# Altium PCB vt18_cpu_board.PcbDoc (part 1 of 7)
Units mil, origin at the board's own origin, x right, y up, seen from the top; angles counter-clockwise.
Board outline 2283.46 x 2244.09 mil, 8 copper layers (Top Layer, GND1, Signal Layer 1, POWER1, POWER2, Signal Layer 2, GND2, Bottom Layer), stack 66.304 mil thick; 339 components, 286 nets, 1965 pads, 1047 vias.
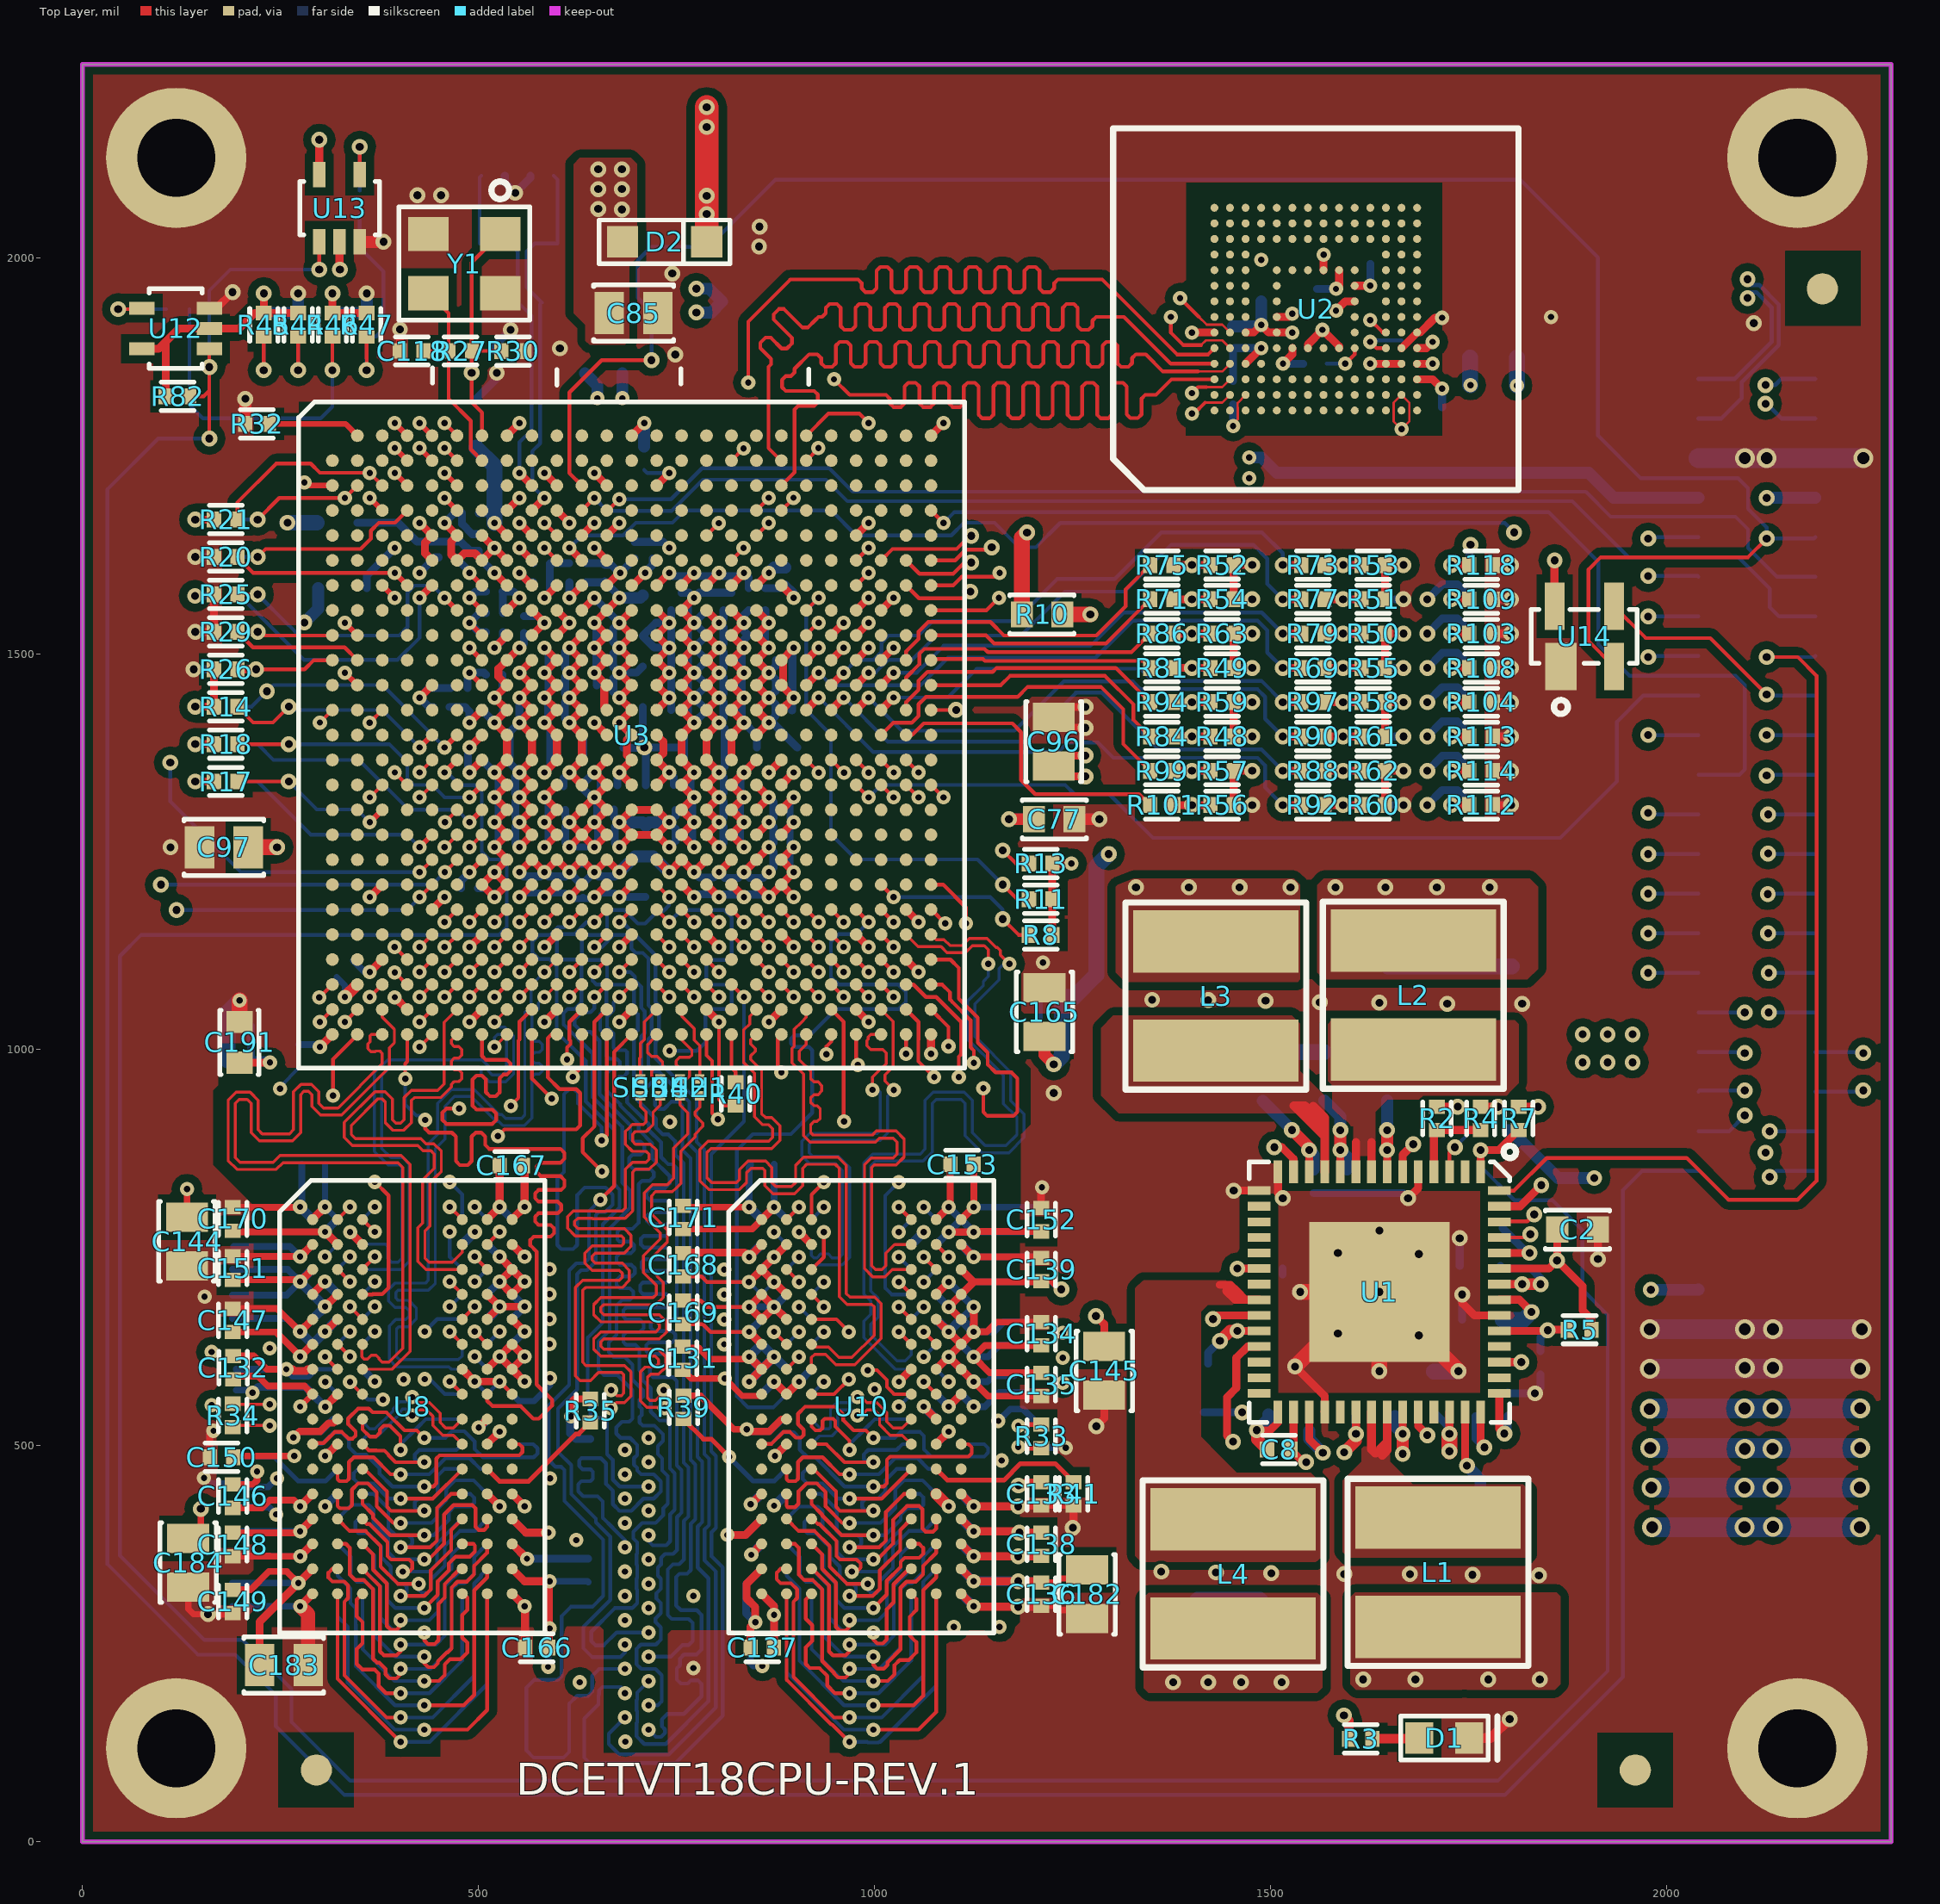
[diagram p0: Top Layer view]
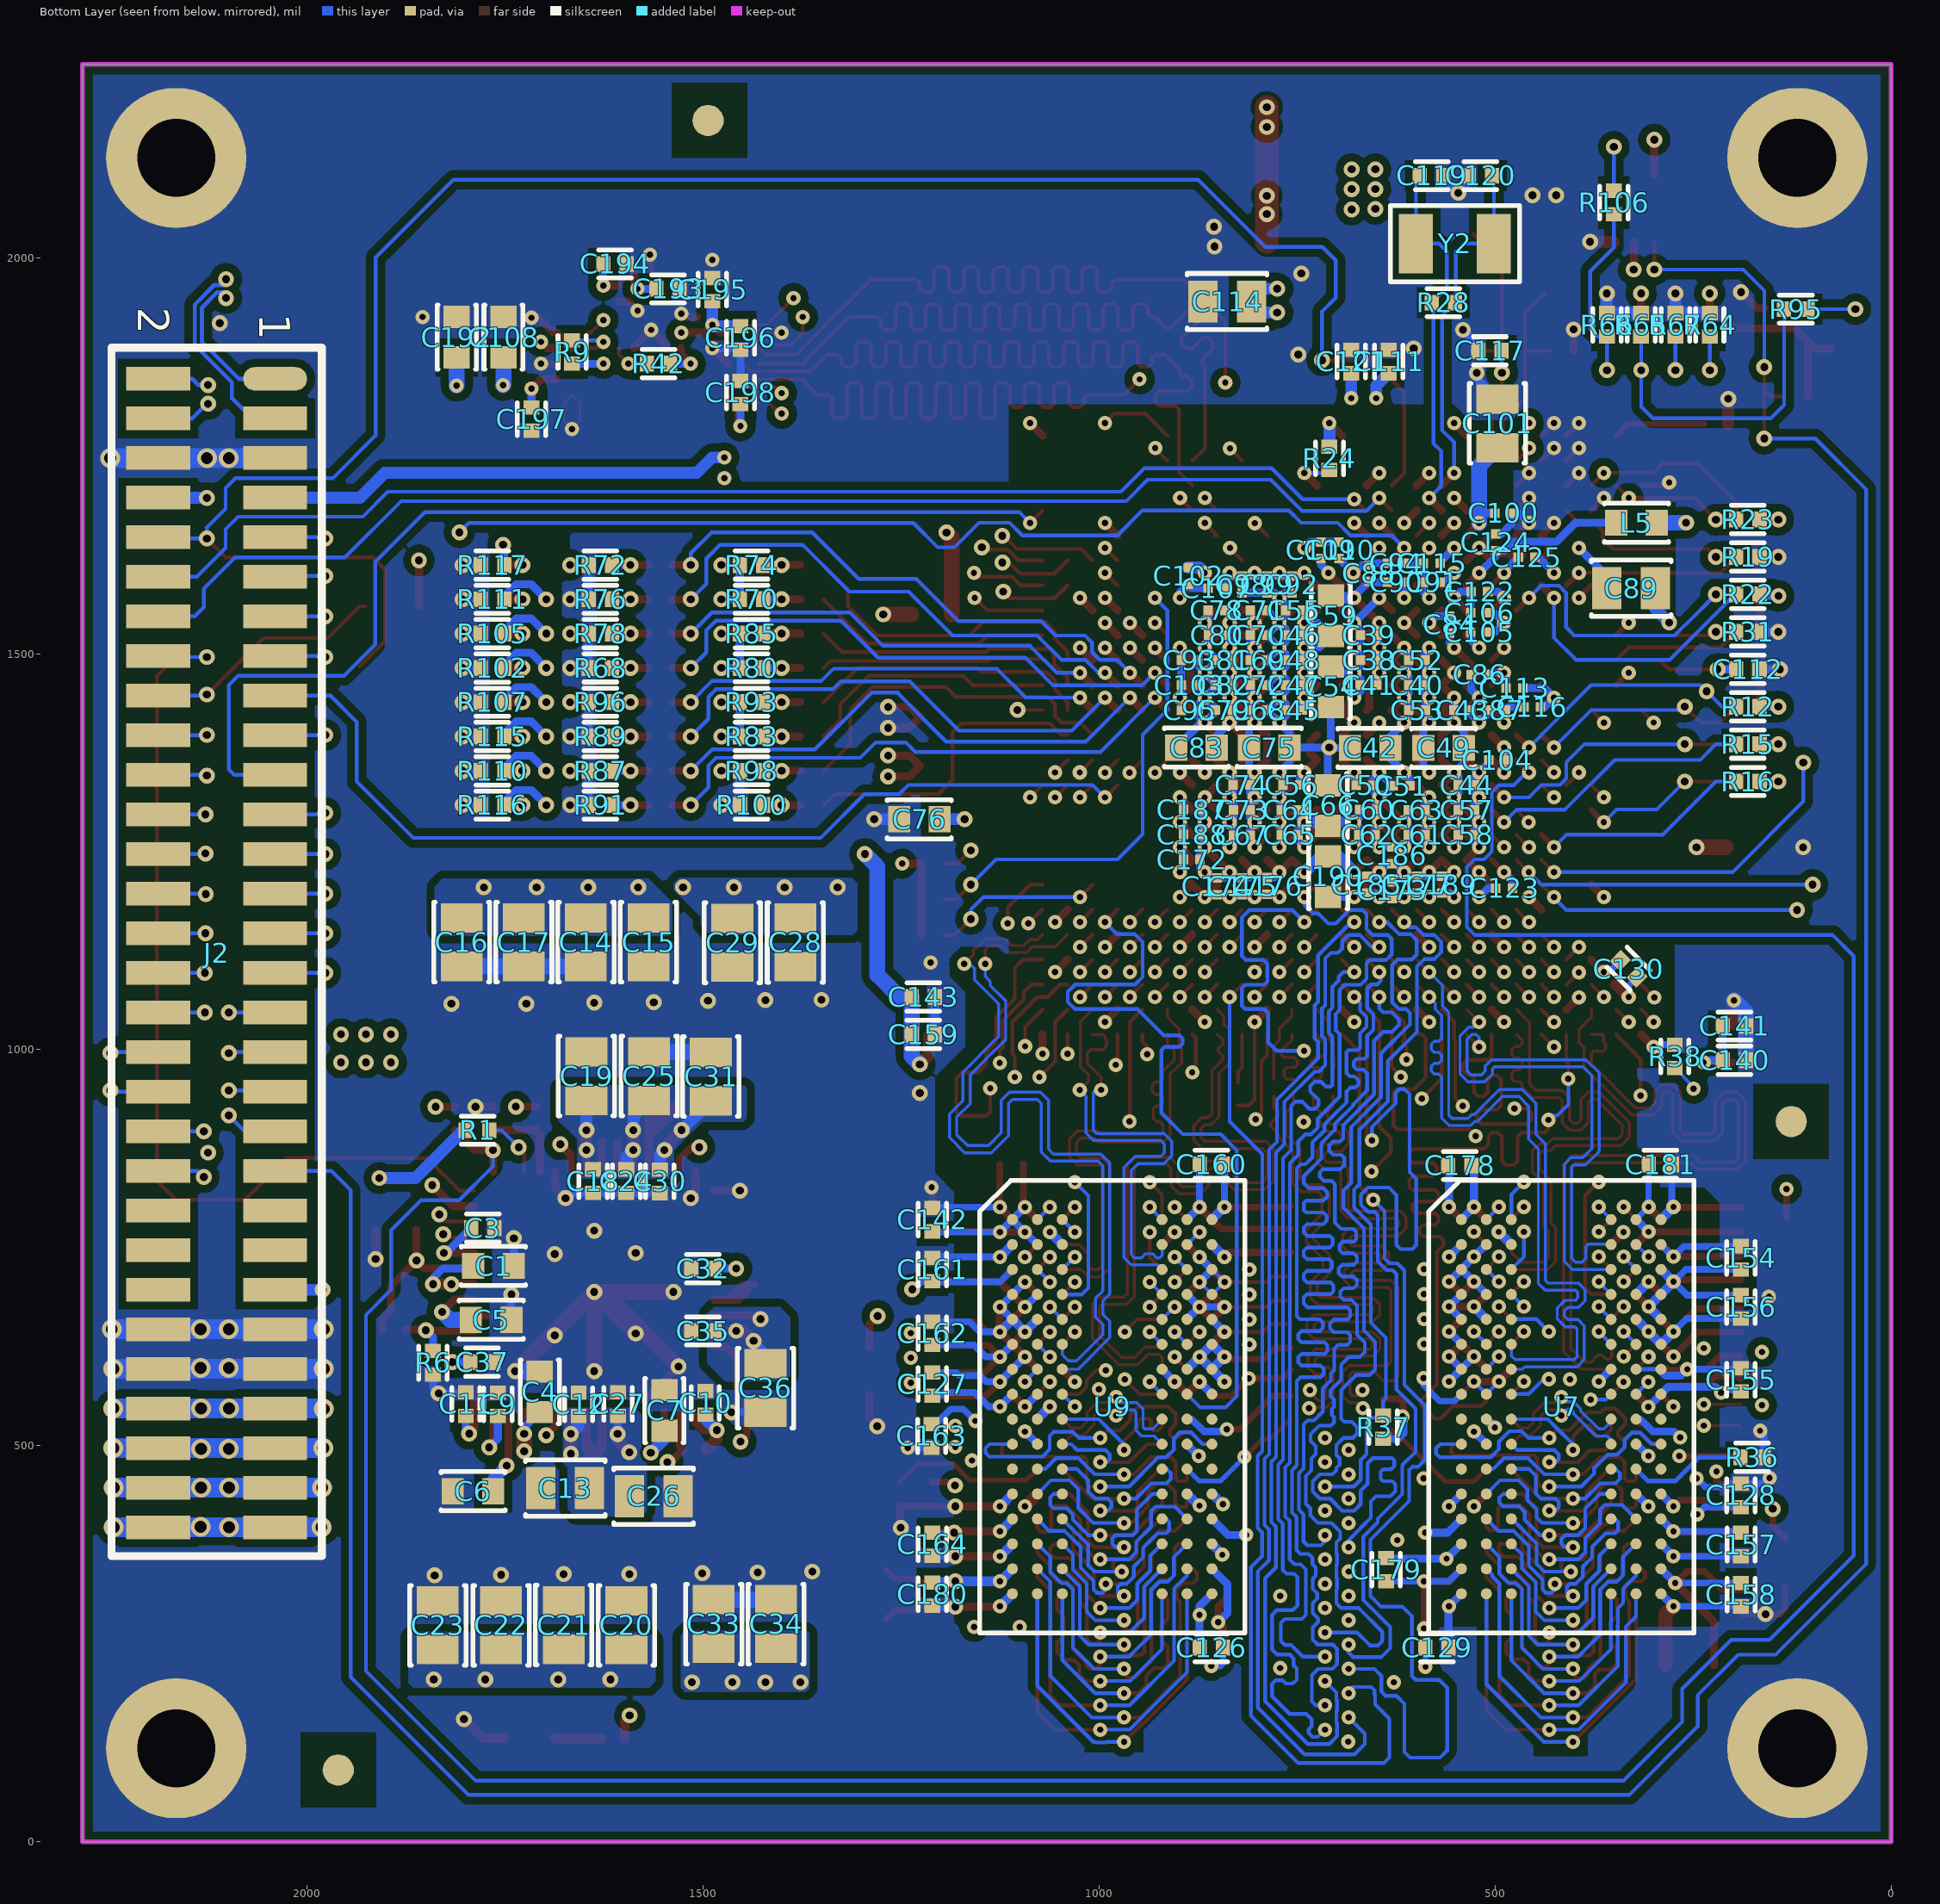
[diagram p1: Bottom Layer view, seen from below]
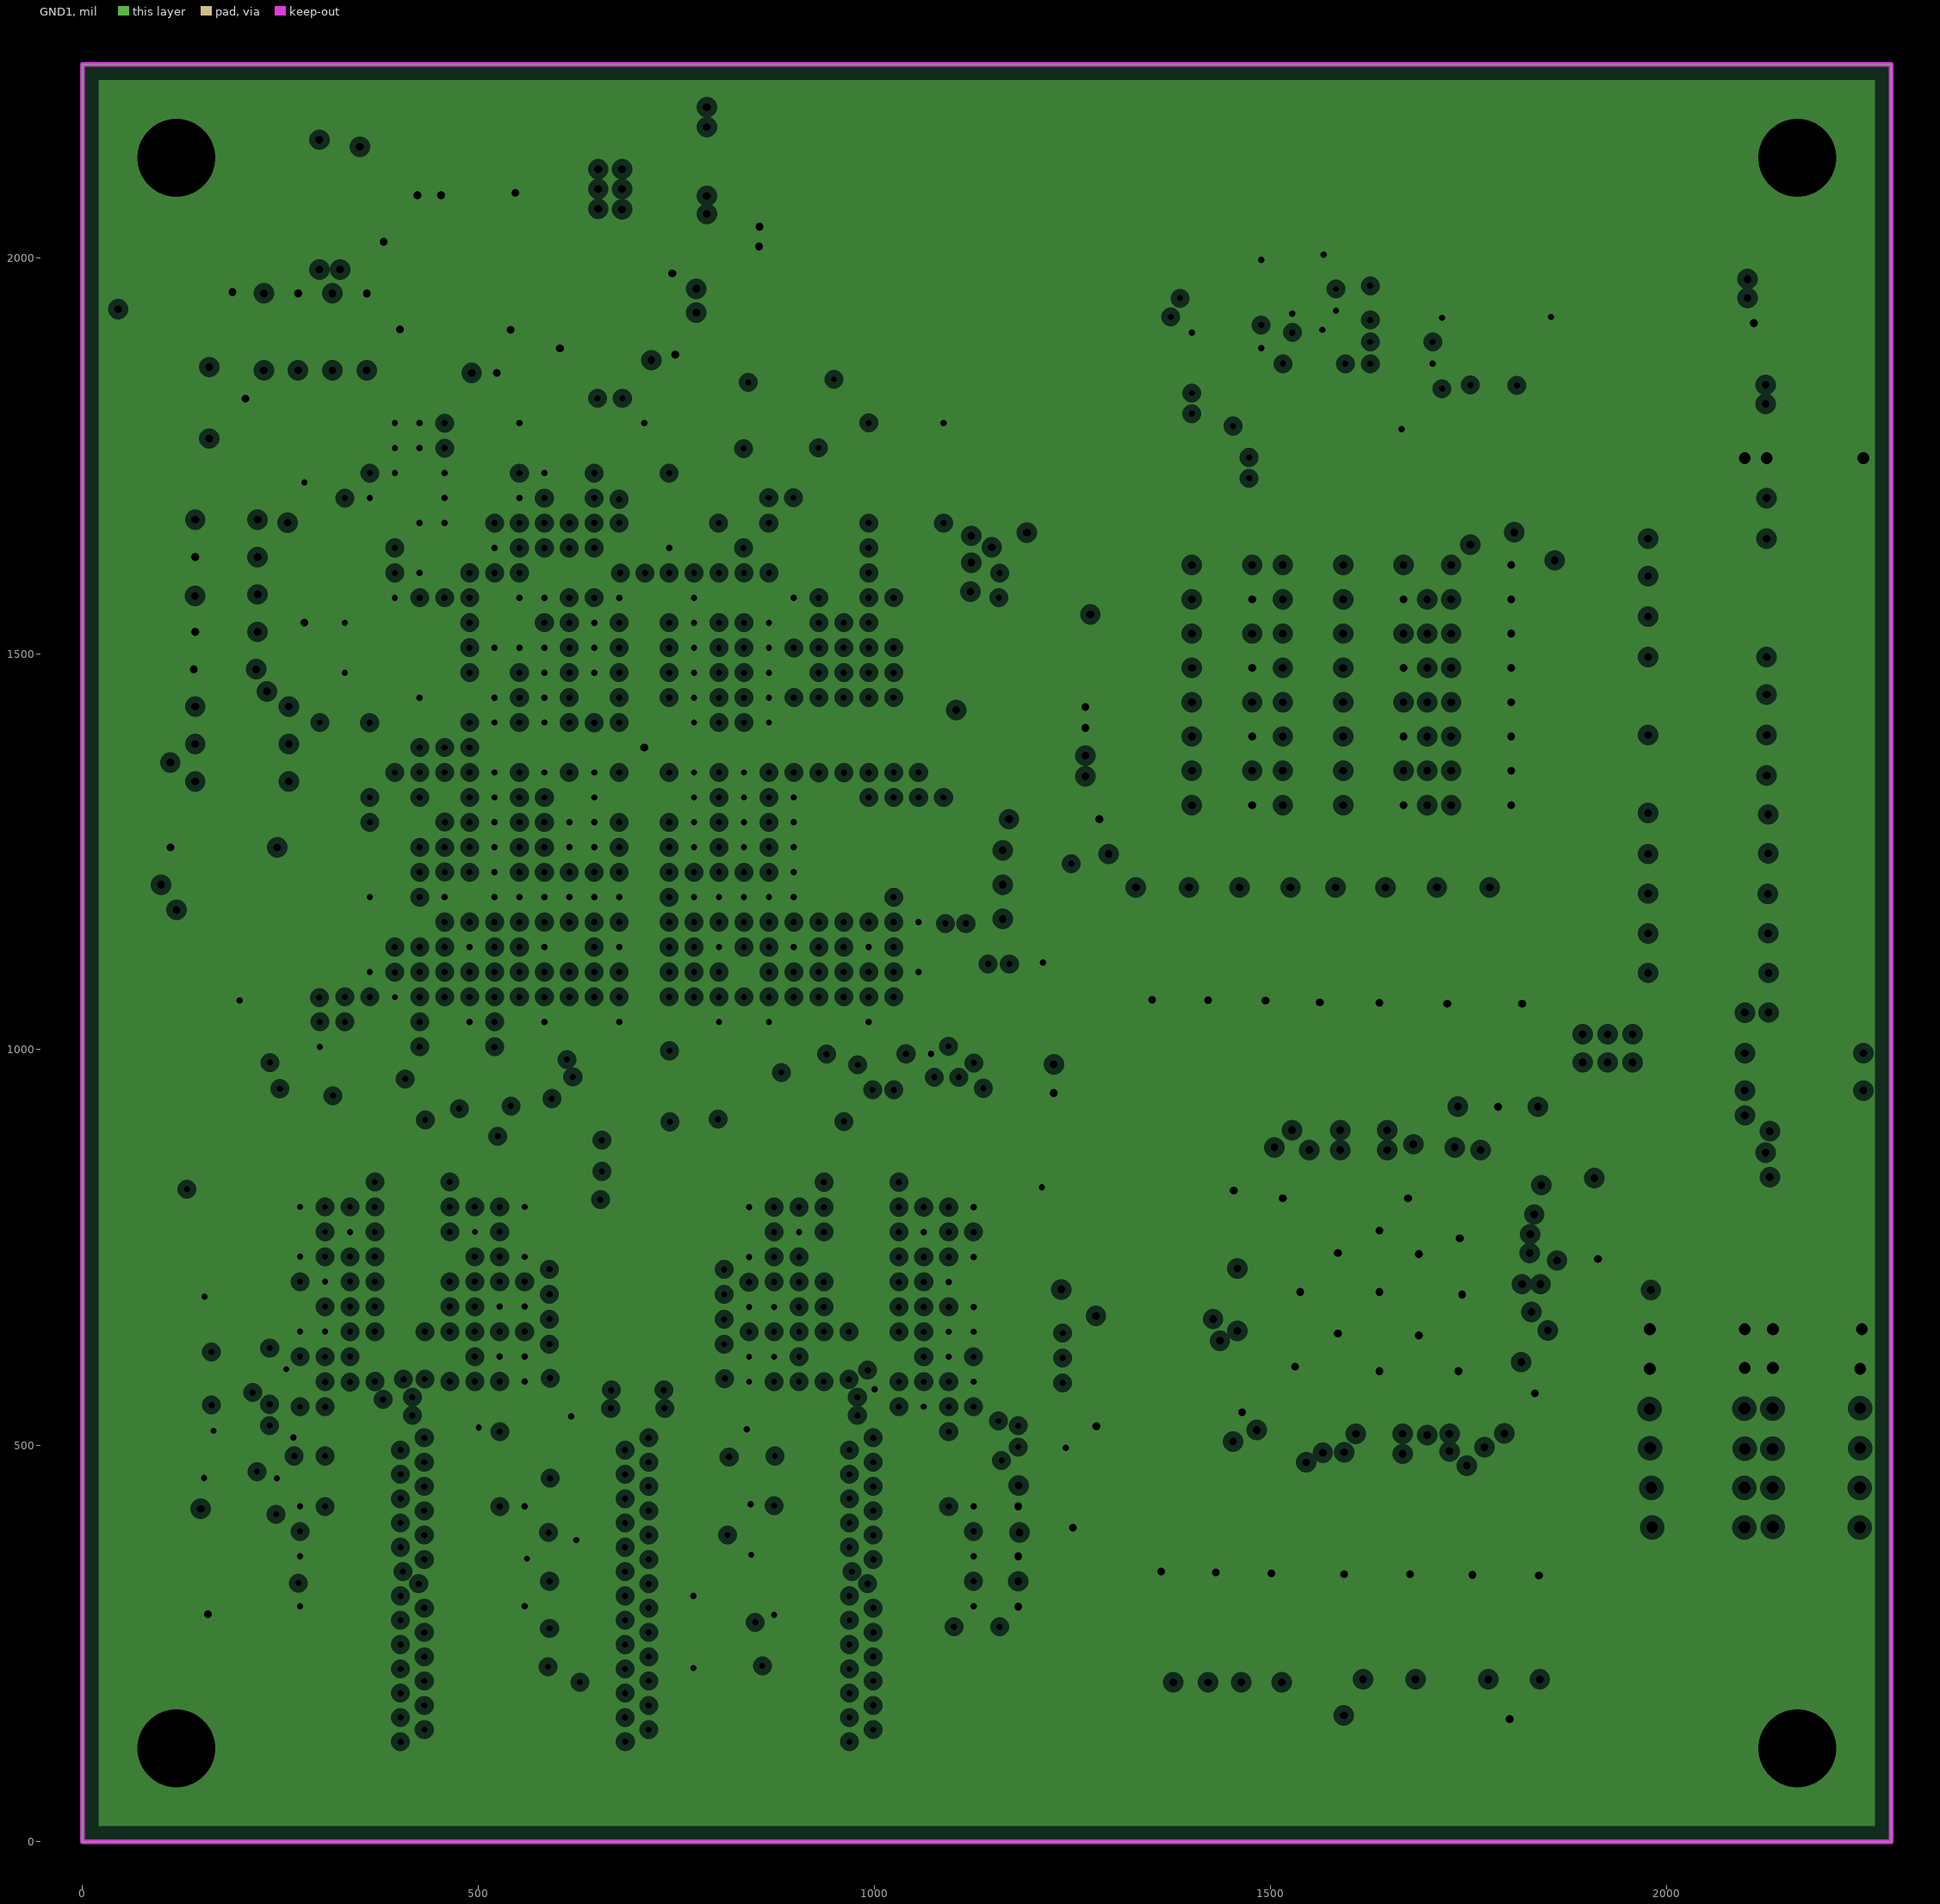
[diagram p2: GND1, clearances drawn from the general rule]
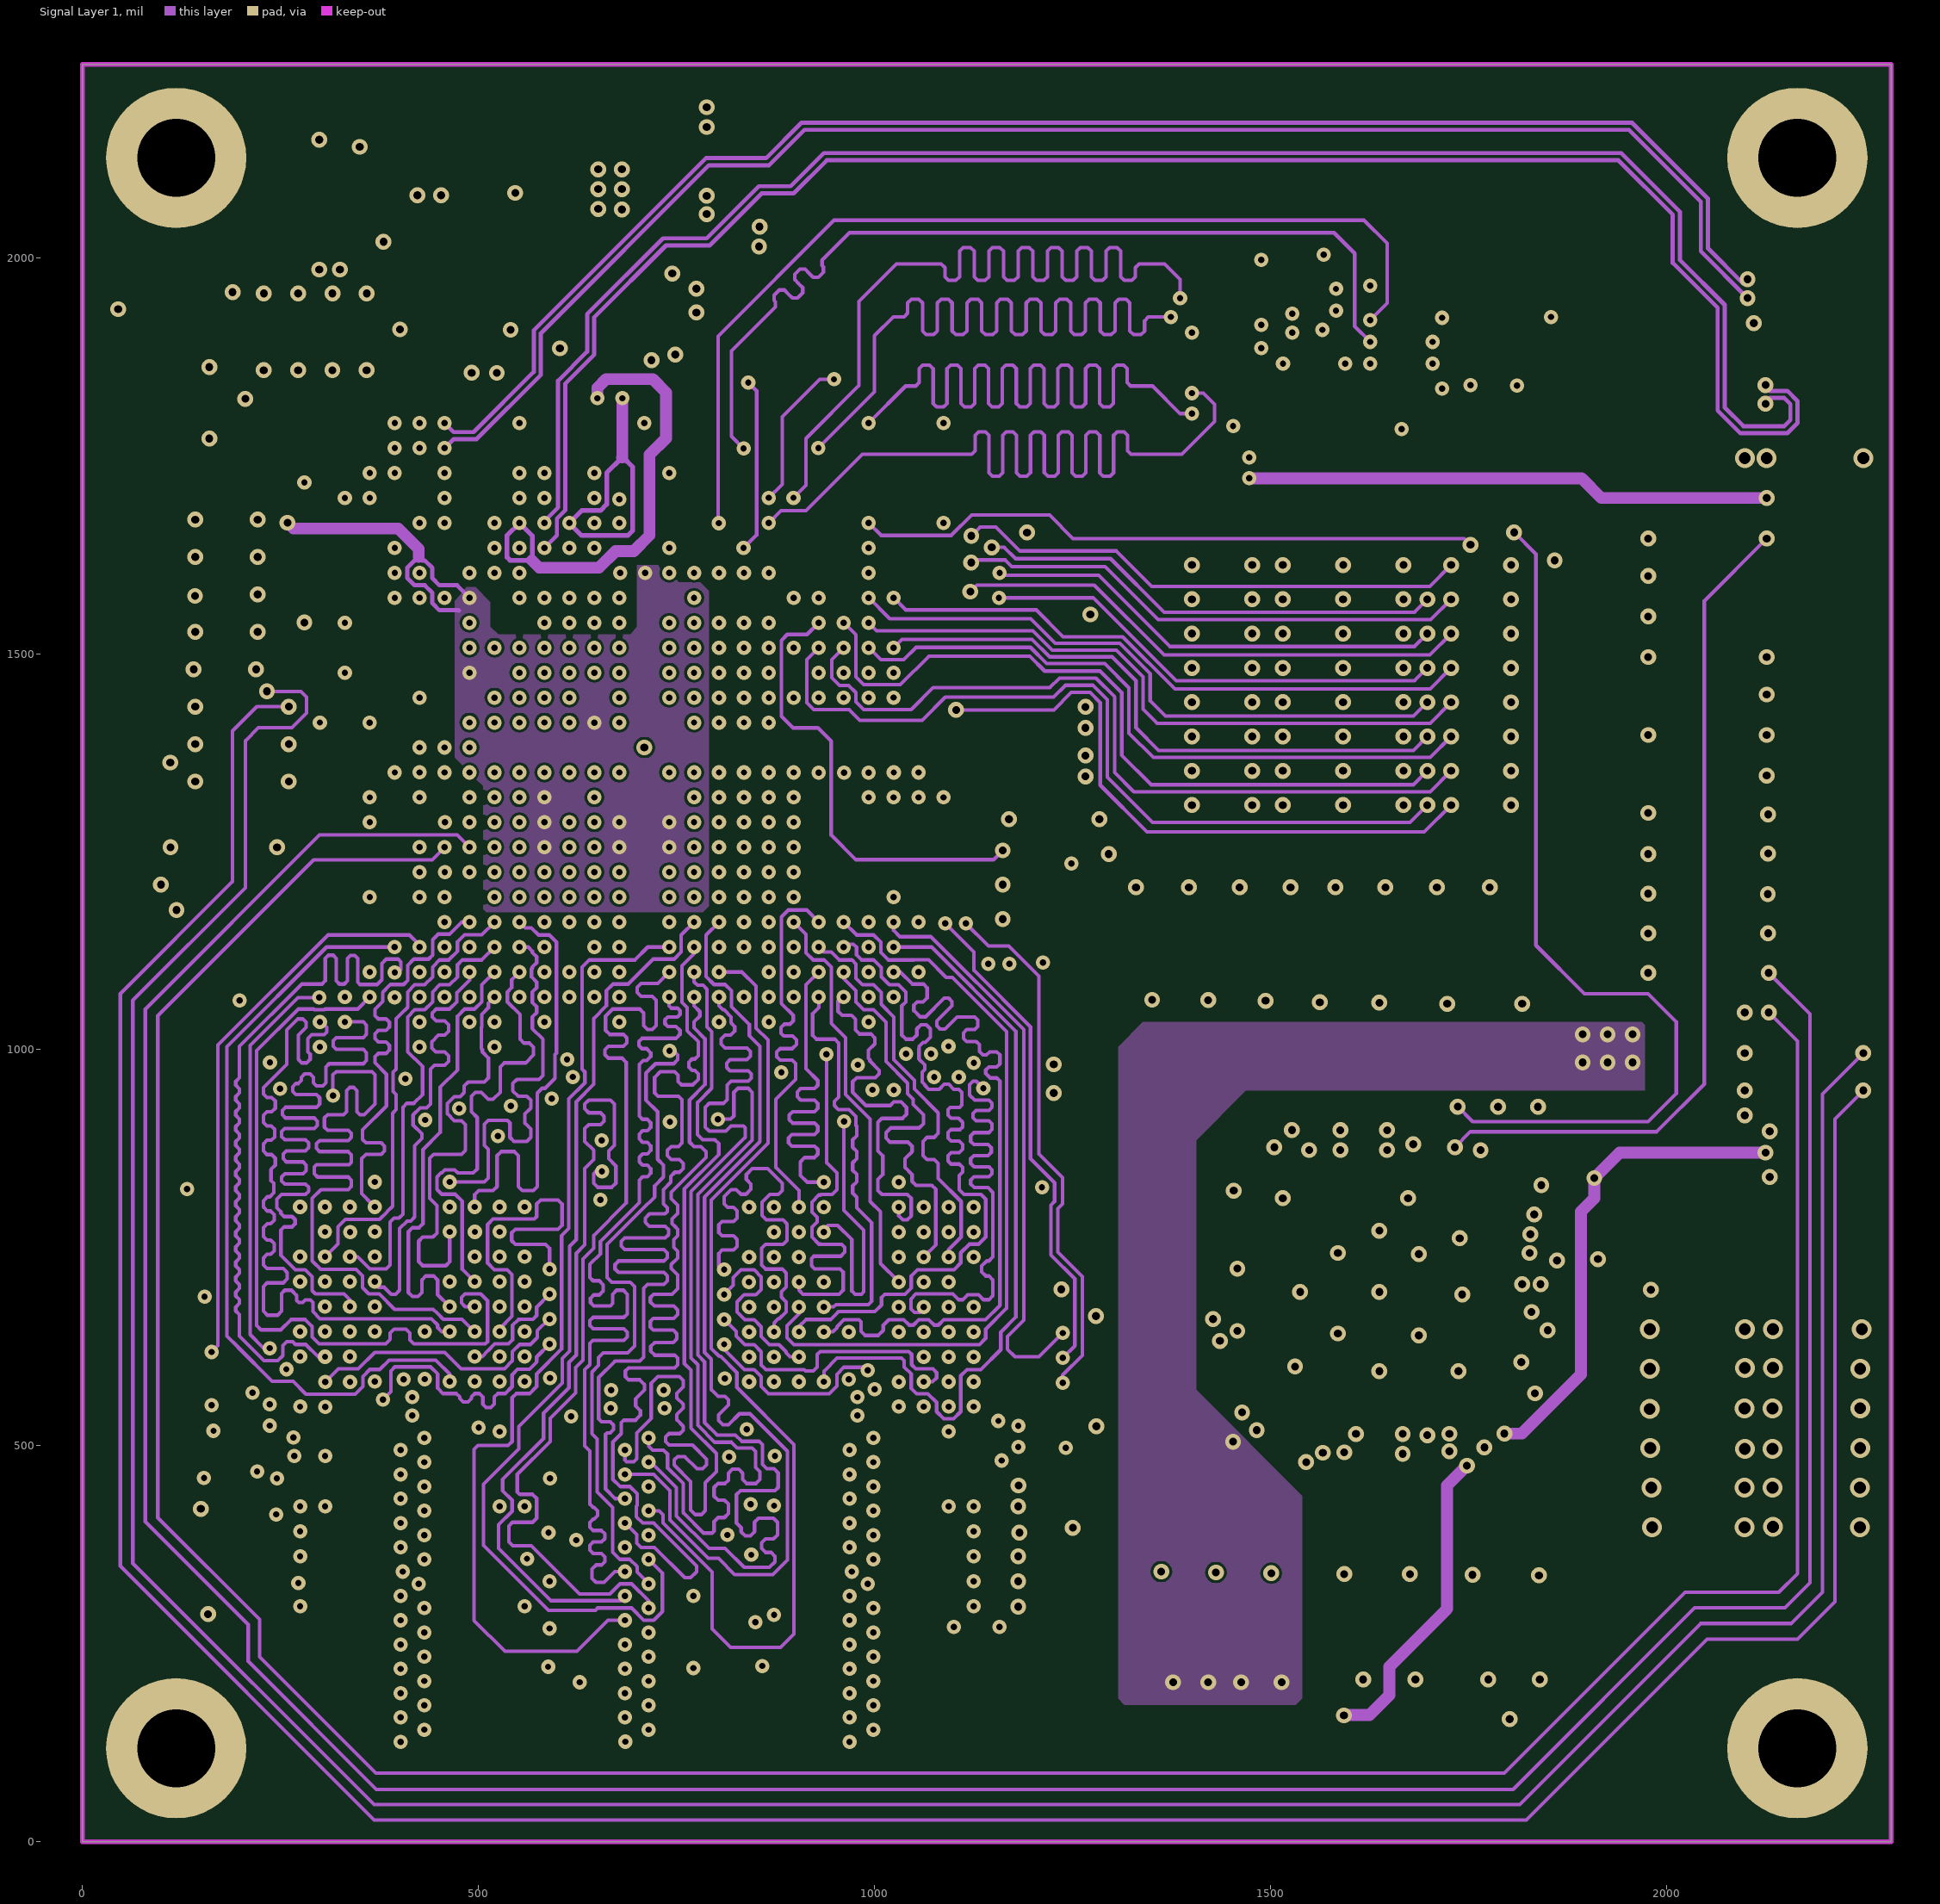
[diagram p3: Signal Layer 1]
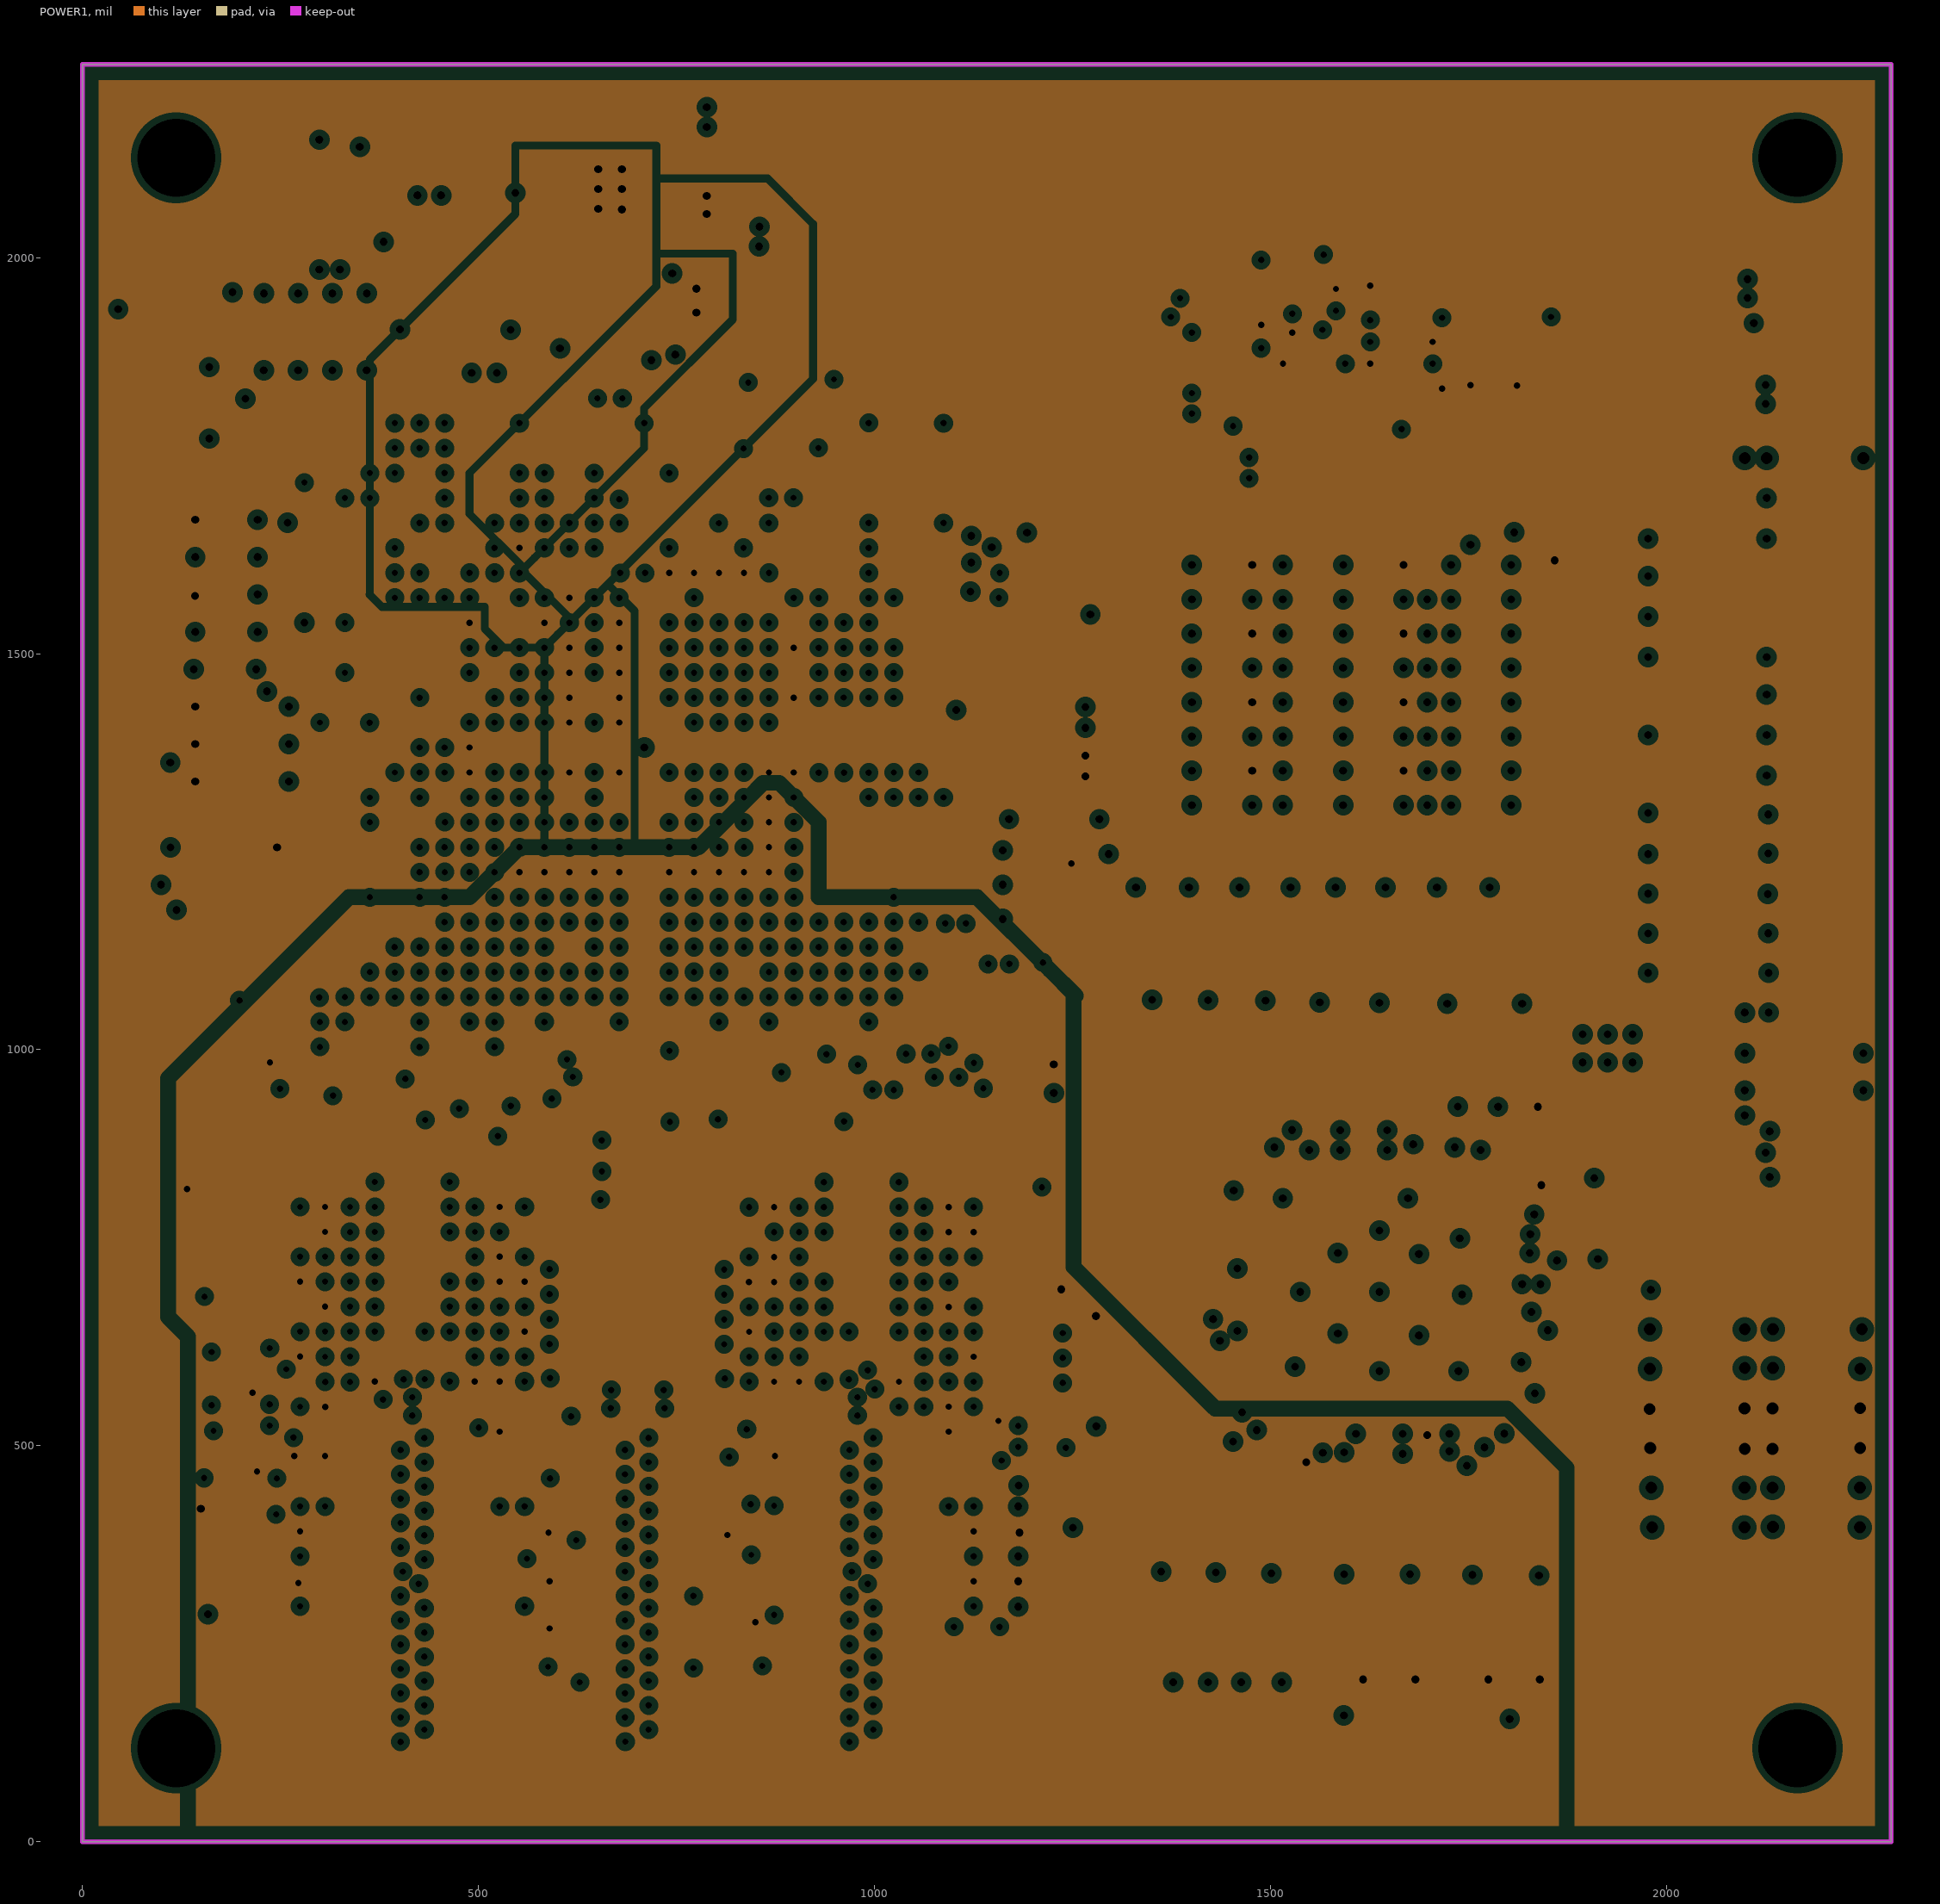
[diagram p4: POWER1, clearances drawn from the general rule]
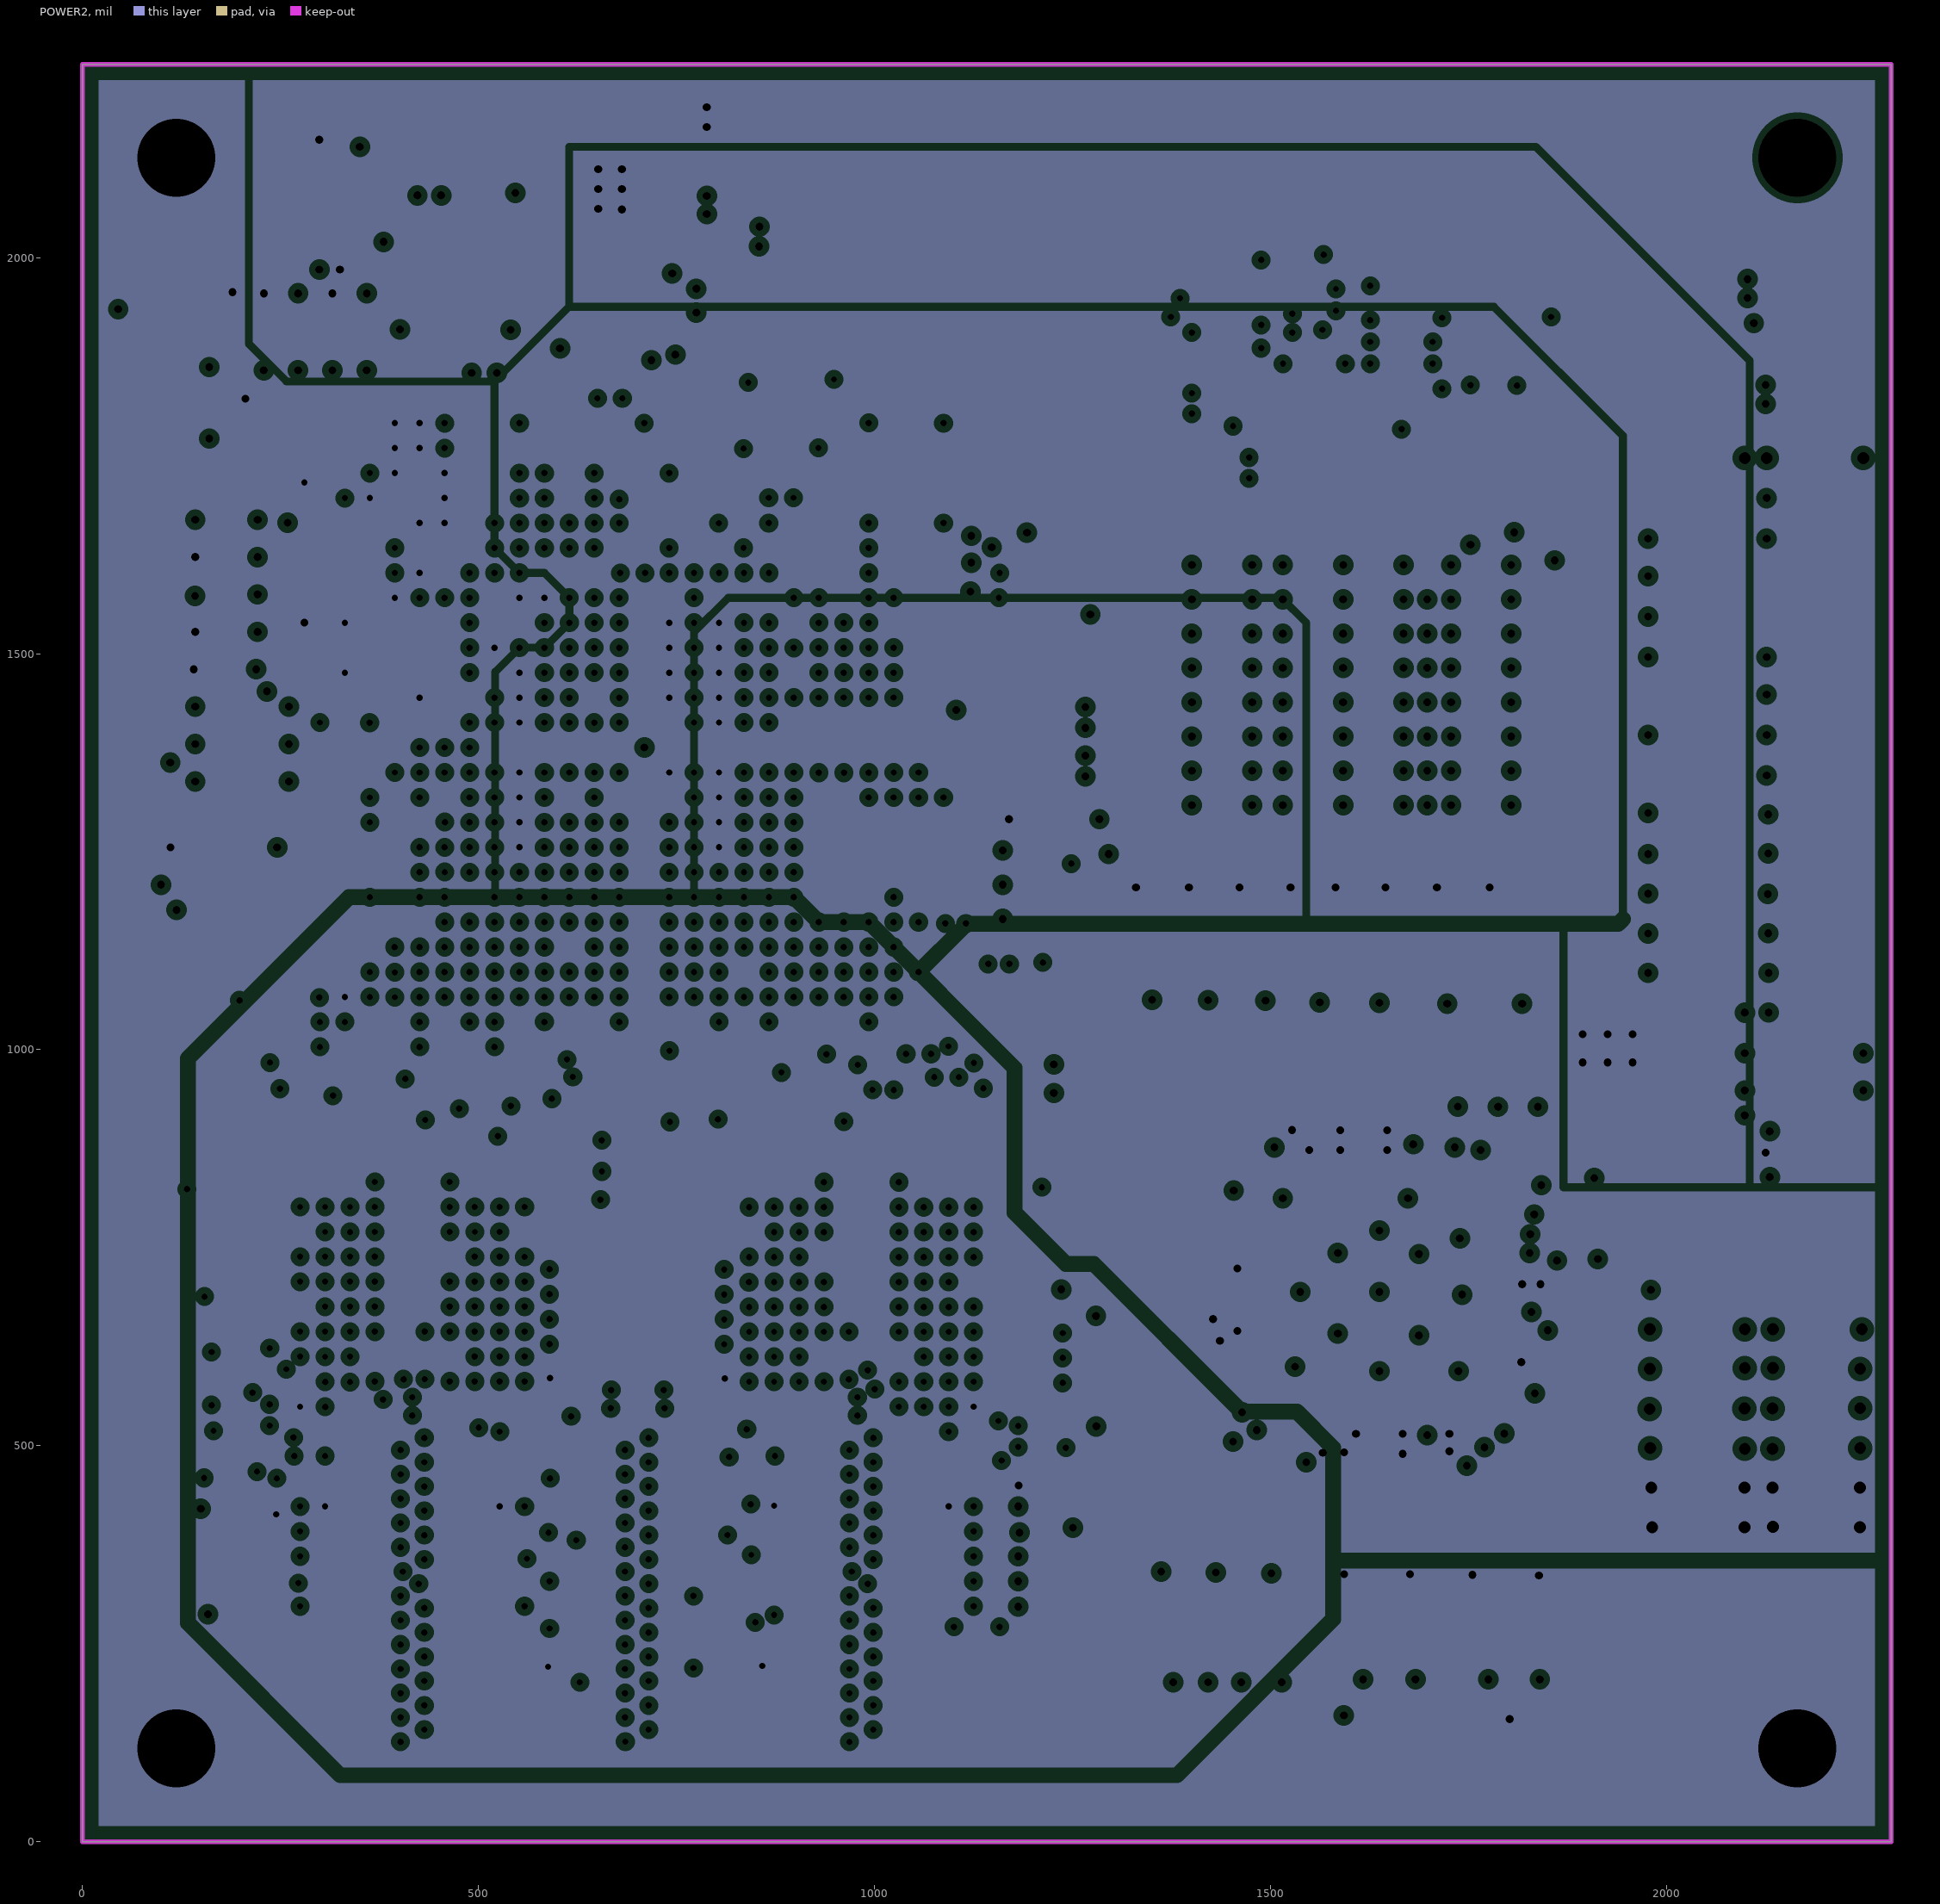
[diagram p5: POWER2, clearances drawn from the general rule]
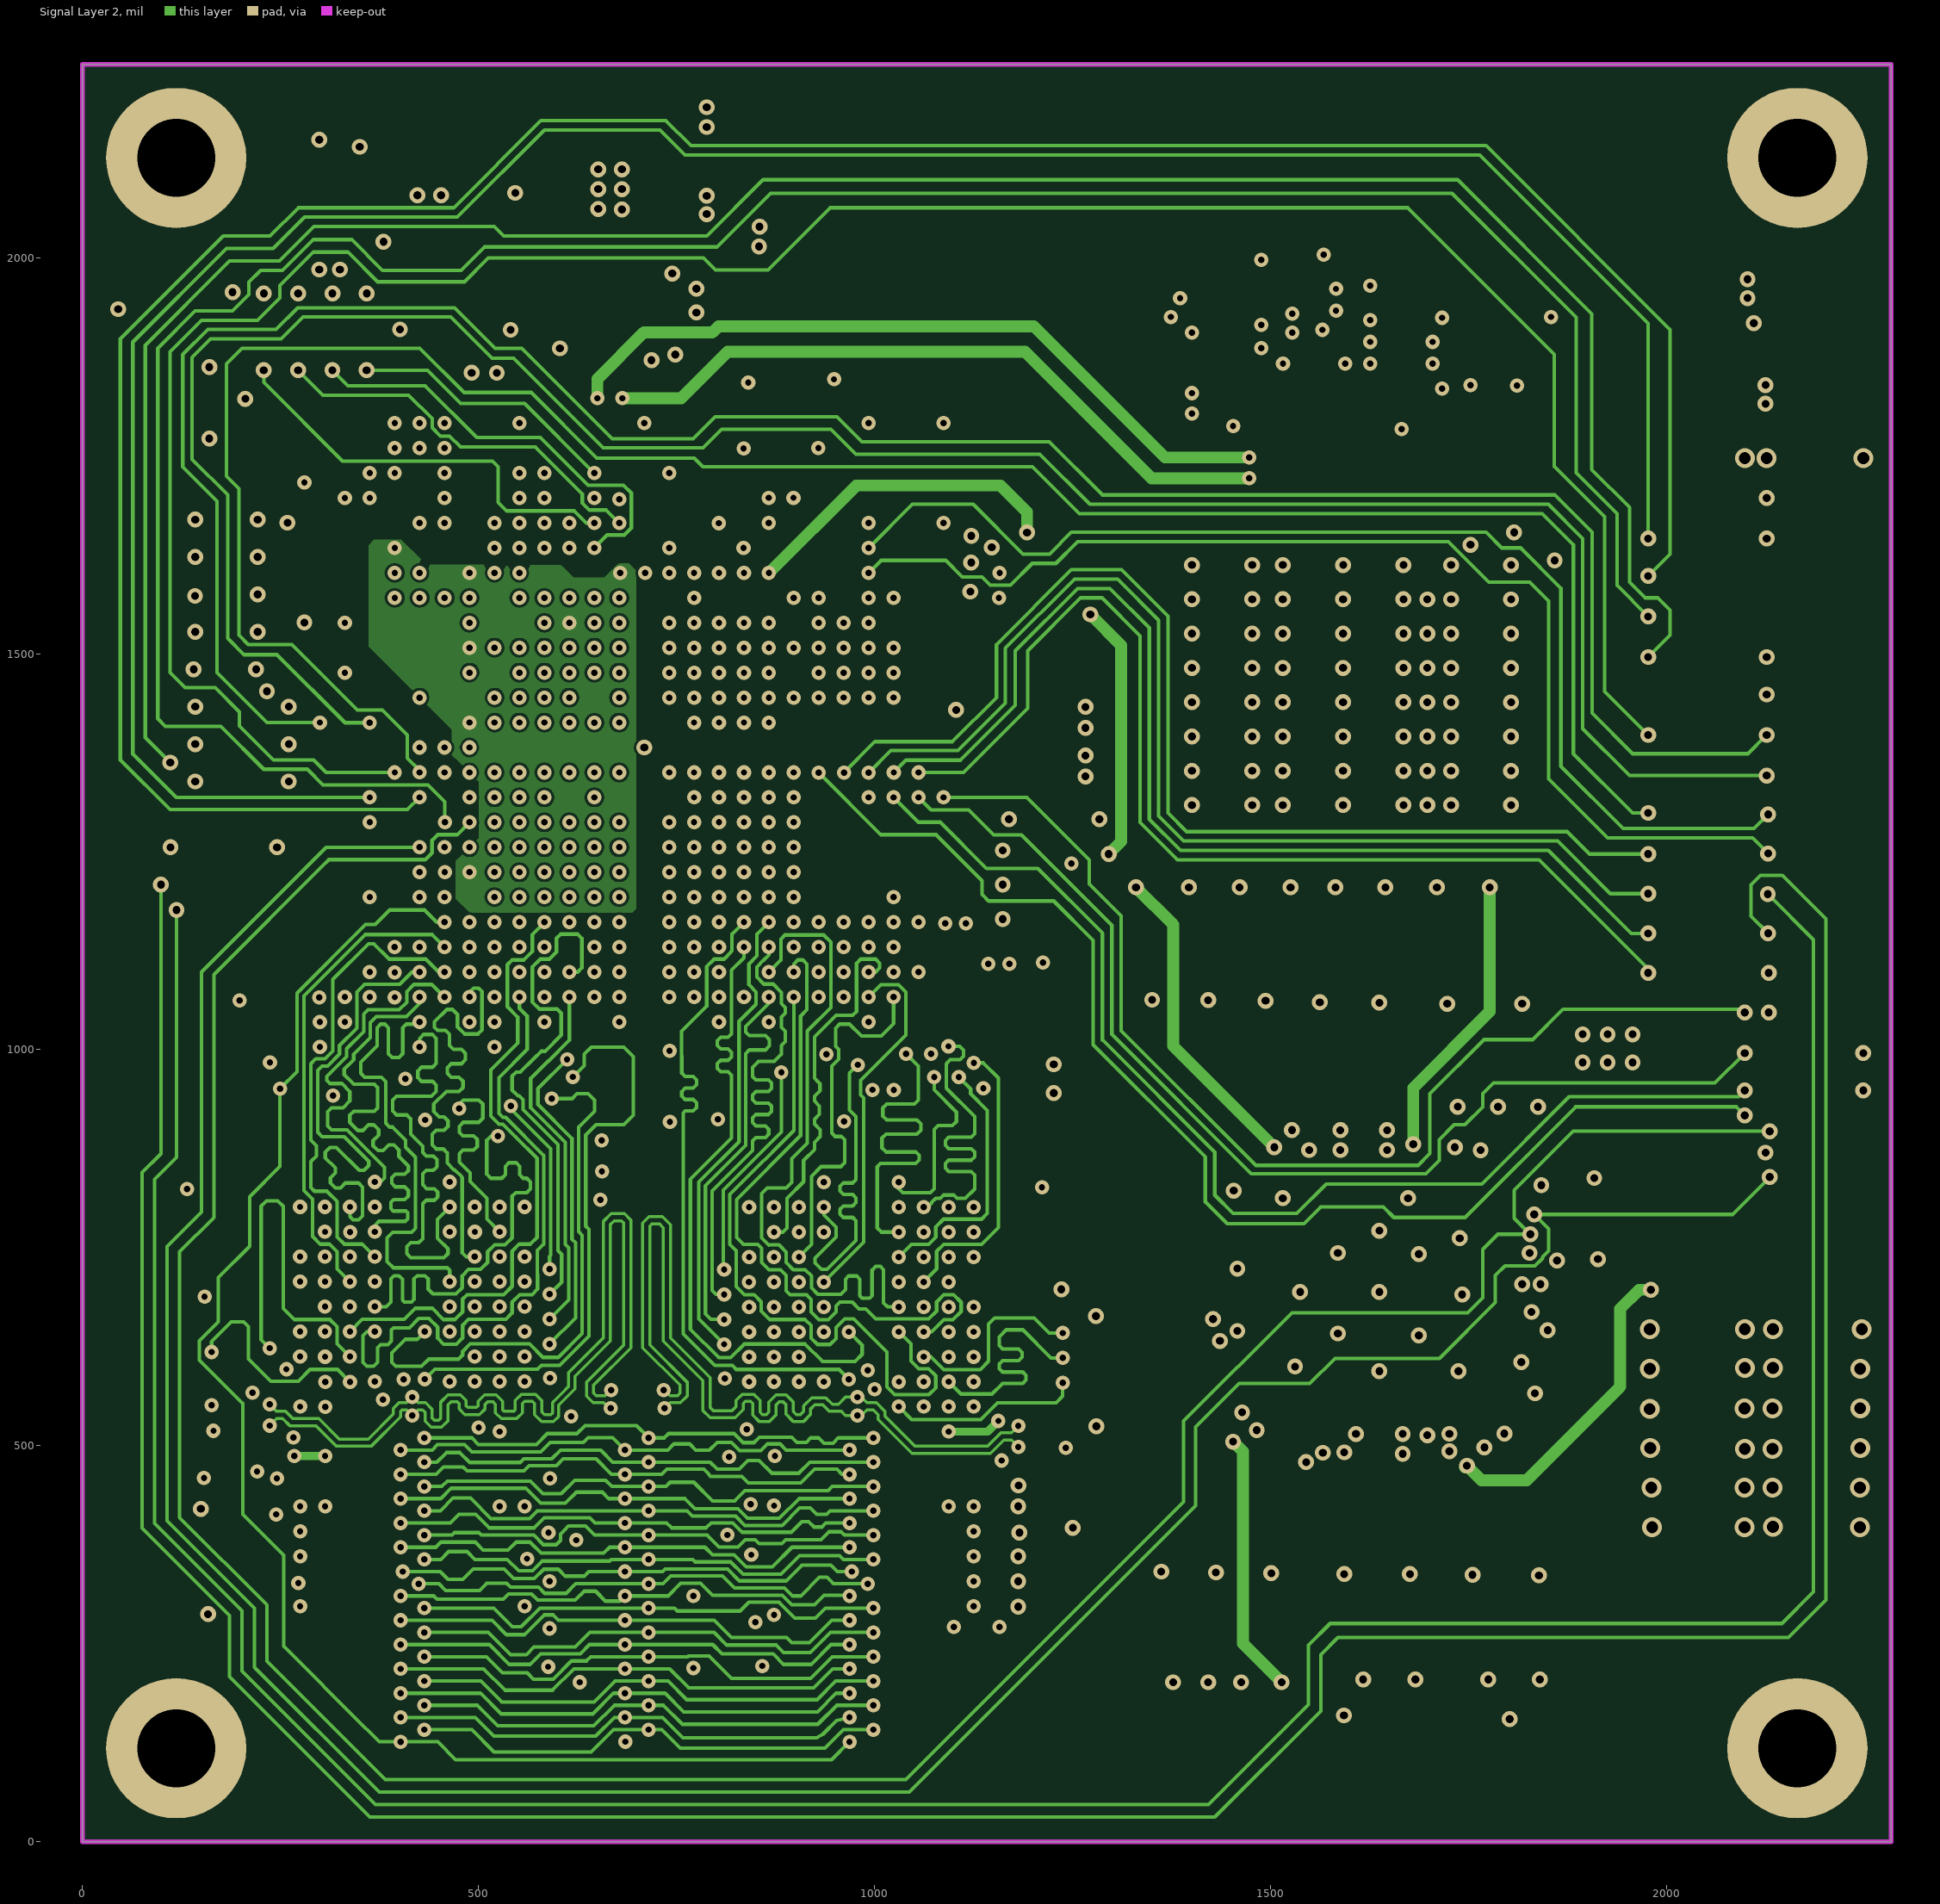
[diagram p6: Signal Layer 2]
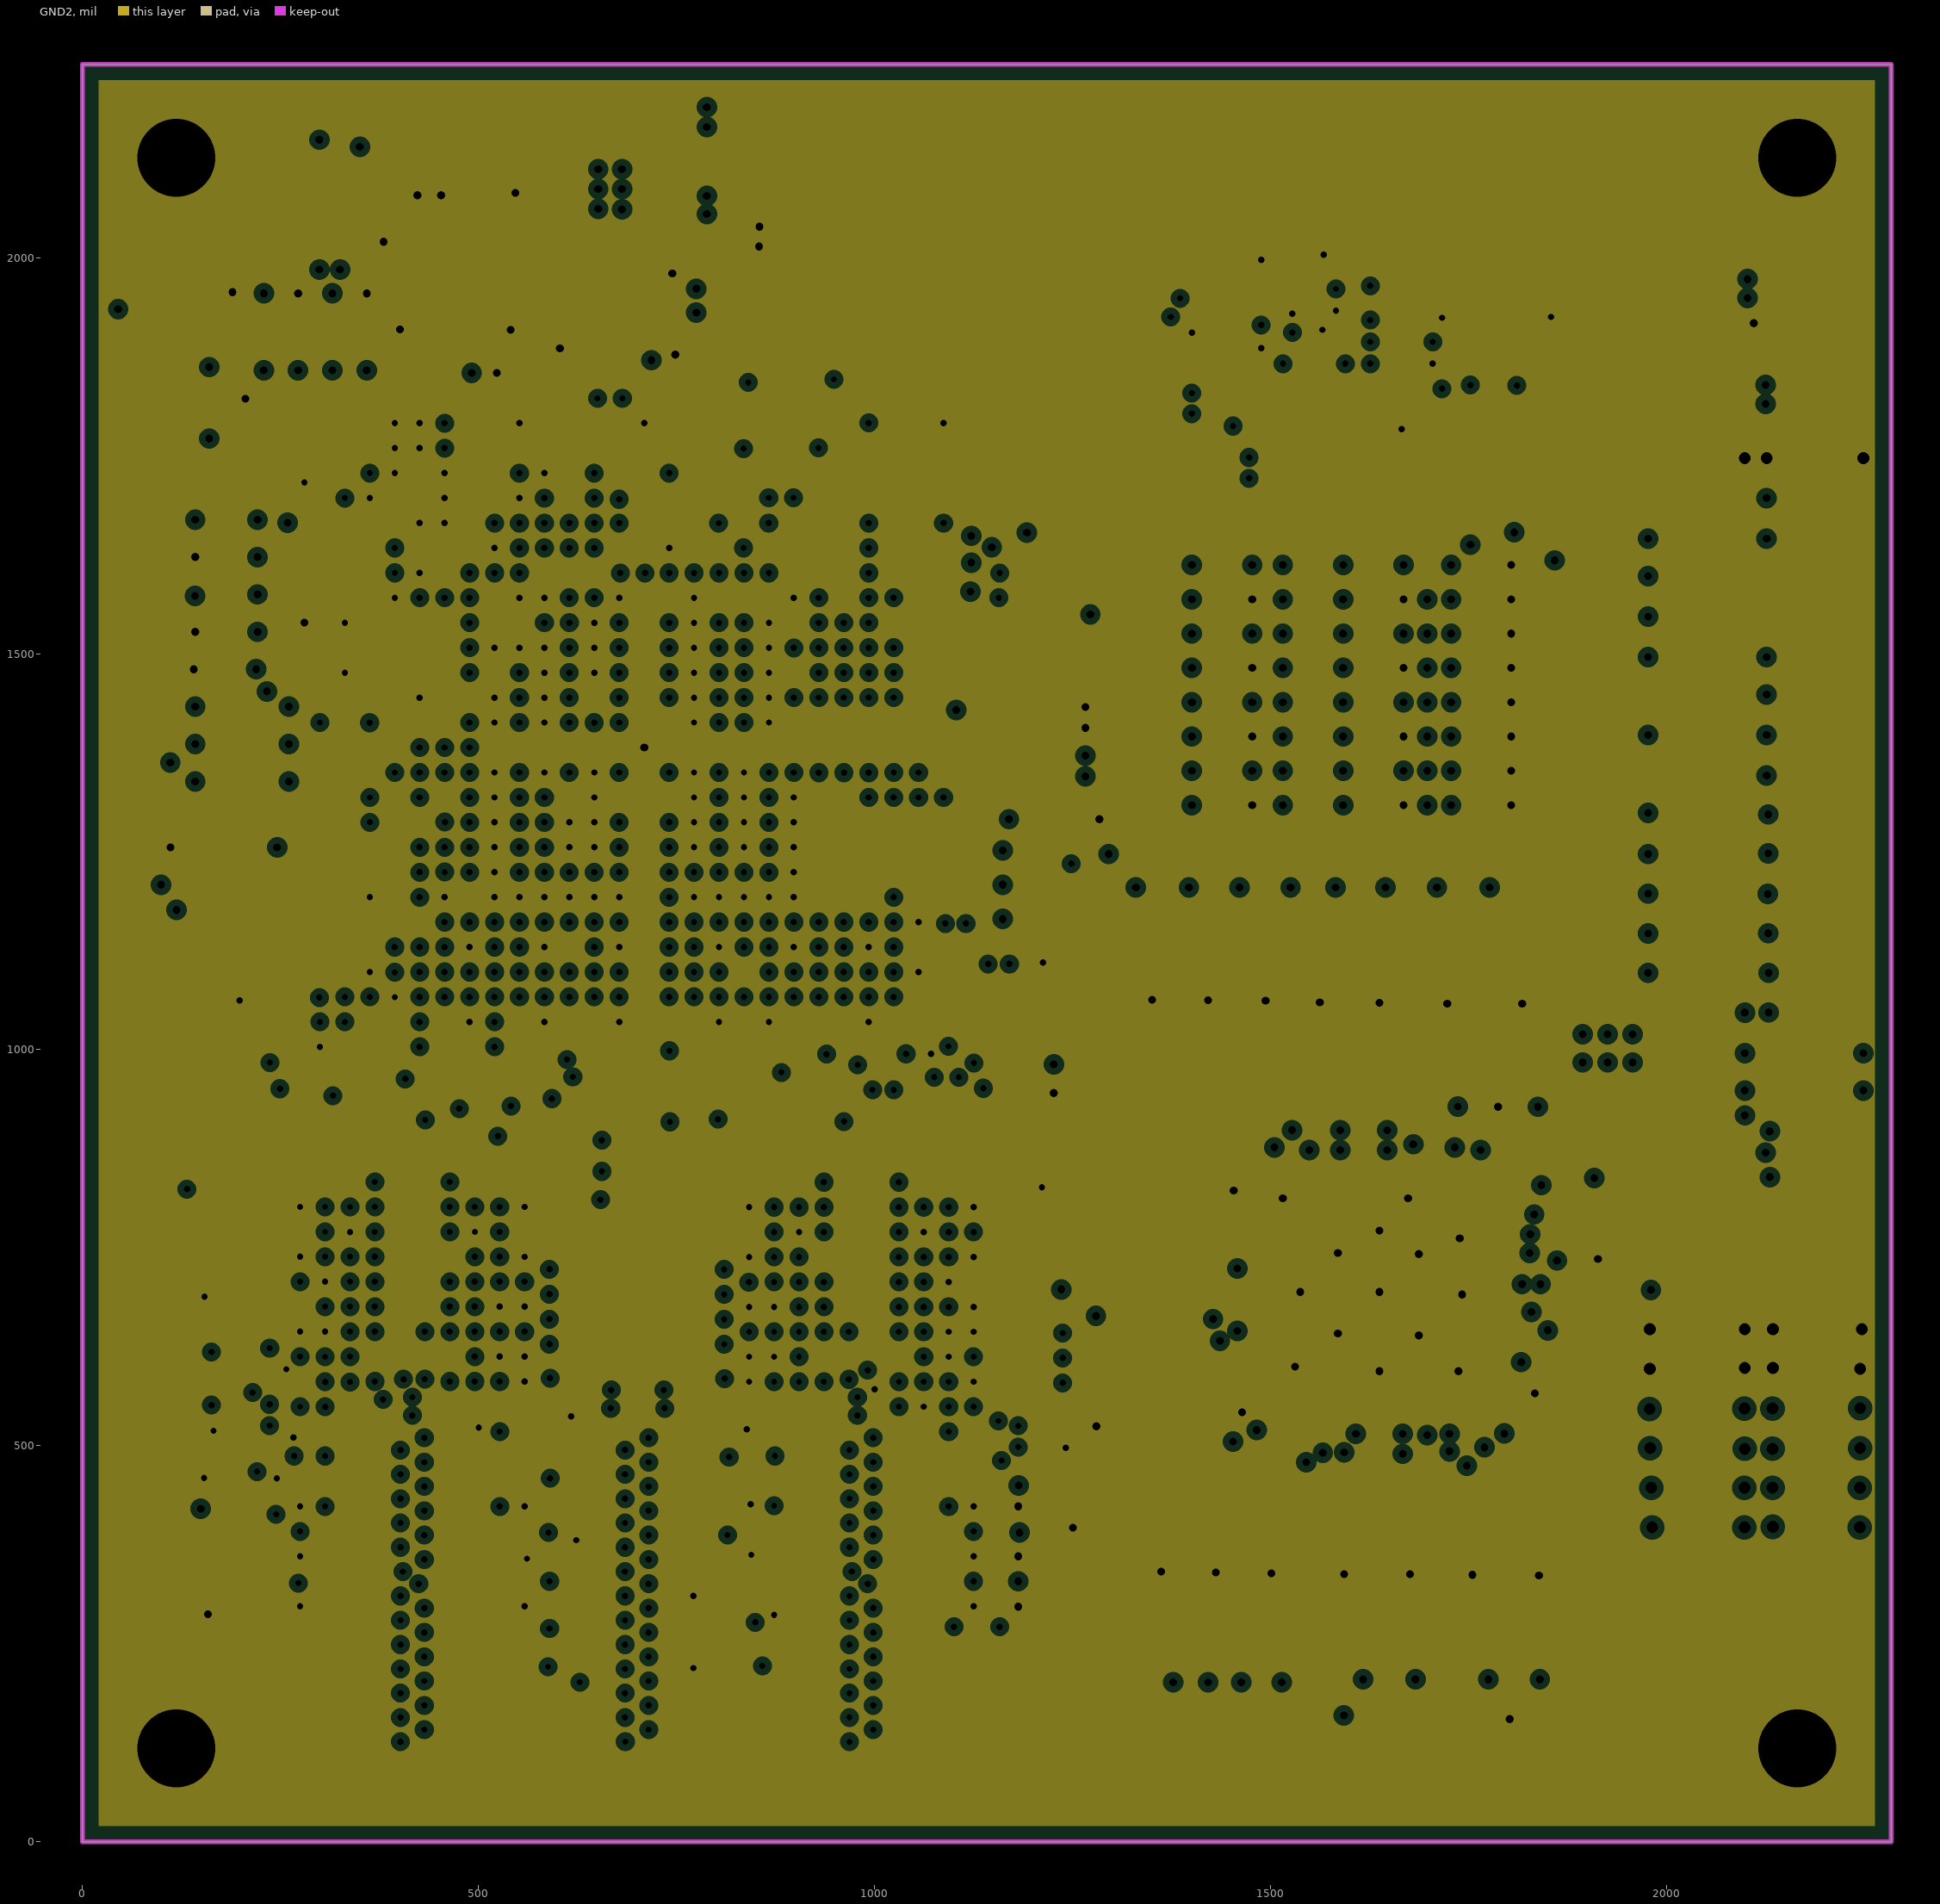
[diagram p7: GND2, clearances drawn from the general rule]

## Layer stack, top to bottom
Top Solder: solder mask 0.4, Solder Resist, Dk 3.5
Top Layer: signal copper 1.4
Dielectric1: core 10, FR-4, Dk 4.2
GND1: plane copper 1.4173
Dielectric7: prepreg 5, Dk 4.2
Signal Layer 1: signal copper 1.4173
Dielectric2: core 10, Dk 4.2
POWER1: plane copper 1.4173
Dielectric8: prepreg 5, Dk 4.2
POWER2: plane copper 1.4173
Dielectric9: core 10, Dk 4.2
Signal Layer 2: signal copper 1.4173
Dielectric3: prepreg 5, Dk 4.2
GND2: plane copper 1.4173
Dielectric10: core 10, Dk 4.2
Bottom Layer: signal copper 1.4
Bottom Solder: solder mask 0.4, Solder Resist, Dk 3.5

## Board outline
0,0 0,2244.09 2283.46,2244.09 2283.46,0

## Design rules (kind name [scope] priority, off if disabled: settings)
Clearance Clearance_1 [InPolygon AND InNet('GND')] p1: gap=10
Clearance [All] p2: gap=3.3
ComponentClearance [All] p1 off: gap=0 collisioncheckmode=3 verticalgap=0 showdistances=FALSE
DiffPairsRouting [InDifferentialPairClass('USB')] p1: maxlimit=10 minlimit=3.7 mostfreqgap=3.8 toplayer_mingap=3.8 toplayer_minwidth=5.3 toplayer_maxwidth=15 toplayer_prefwidth=5.3 midlayer1_prefgap=3.7 midlayer1_minwidth=5.3 midlayer1_maxwidth=15 midlayer1_prefwidth=5.3 midlayer2_prefgap=3.7 midlayer2_minwidth=5.3 midlayer2_maxwidth=15 midlayer2_prefwidth=5.3 bottomlayer_mingap=3.8 bottomlayer_minwidth=5.3 bottomlayer_maxwidth=15 bottomlayer_prefwidth=5.3 maxuncoupledlength=500
DiffPairsRouting DiffPair_DiffPairsRouting [All] p2 off: maxlimit=5.3 minlimit=5.2 mostfreqgap=5.3 toplayer_mingap=5.3 toplayer_minwidth=15 toplayer_maxwidth=15 toplayer_prefwidth=15 midlayer1_maxgap=5.2 midlayer1_prefgap=5.2 midlayer1_minwidth=15 midlayer1_maxwidth=15 midlayer1_prefwidth=15 midlayer2_maxgap=5.2 midlayer2_prefgap=5.2 midlayer2_minwidth=15 midlayer2_maxwidth=15 midlayer2_prefwidth=15 bottomlayer_mingap=5.3 bottomlayer_minwidth=15 bottomlayer_maxwidth=15 bottomlayer_prefwidth=15 maxuncoupledlength=500
DiffPairsRouting DiffPair_DiffPairsRouting_90 [All] p3: maxlimit=3.7 minlimit=3.7 mostfreqgap=3.7 toplayer_minwidth=15 toplayer_maxwidth=15 toplayer_prefwidth=15 midlayer1_minwidth=15 midlayer1_maxwidth=15 midlayer1_prefwidth=15 midlayer2_minwidth=15 midlayer2_maxwidth=15 midlayer2_prefwidth=15 bottomlayer_minwidth=15 bottomlayer_maxwidth=15 bottomlayer_prefwidth=15 maxuncoupledlength=500
Height [All] p1 off: minheight=0 maxheight=1000 prefheight=500
MatchedLengths DiffPair_MatchedLengths [All] p1 off: tolerance=1000 checknetsindiffpair=TRUE checkdiffpairvsdiffpair=TRUE checkothers=TRUE
MinimumSolderMaskSliver [All] p1: minsoldermaskwidth=3
PlaneClearance PlaneClearance_1 [InPadClass('MT')] p1: clearance=40
PlaneClearance [All] p2: clearance=8
PlaneConnect [All] p1: planeconnectstyle=Direct reliefexpansion=20 reliefentries=4 reliefconductorwidth=10 reliefairgap=10
PolygonConnect [All] p1: connectstyle=Direct reliefconductorwidth=20 reliefentries=4 polygonreliefangle="90 Angle" airgapwidth=10
RoutingVias [All] p1: holewidth=7.99 width=17.99 viastyle="Through Hole" minholewidth=7.99 minwidth=17.99 maxholewidth=19.68 maxwidth=39.37
SilkToSilkClearance [All] p1: silktosilkclearance=0
SilkToSolderMaskClearance [IsPad] p1: minsilkscreentomaskgap=0 clearancetoexposedcopper=TRUE
SolderMaskExpansion [All] p1: expansion=2
Width DiffPairWidth_90 [All] p1 off: maxlimit=7 minlimit=3 preferedwidth=5.3 minimp=50.000000 maximp=50.000000 favimp=50.000000
Width DiffPair_Width [All] p2 off: maxlimit=78.74 minlimit=3.7 preferedwidth=3.8 toplayer_prefwidth=3.7 midlayer1_minwidth=3.8 midlayer2_minwidth=3.8 bottomlayer_prefwidth=3.7 minimp=50.000000 maximp=50.000000 favimp=50.000000
Width [All] p3: maxlimit=78.74 minlimit=3 preferedwidth=4.7 midlayer1_minwidth=3.7 midlayer1_maxwidth=78.74 midlayer1_prefwidth=4.5 midlayer2_minwidth=3.7 midlayer2_maxwidth=78.74 midlayer2_prefwidth=4.5 bottomlayer_minwidth=3.7 minimp=50.000000 maximp=50.000000 favimp=50.000000
22 further rules are at their usual default settings.

## Classes and differential pairs
differential pair class USB: USB-HOST USB-OTG
pad class MT: Free-MT1 Free-MT2 Free-MT3 Free-MT4
net class EMMC: EMMC-CLK EMMC-CMD EMMC-DATA0 EMMC-DATA1 EMMC-DATA2 EMMC-DATA3 EMMC-DATA4 EMMC-DATA5 EMMC-DATA6 EMMC-DATA7
net class UART: UART1-RXD UART1-TXD UART3-RXD UART3-TXD UART4-RXD UART4-TXD UART5-RXD UART5-TXD
net class DRAM_D[63..0]: DRAM_D0 DRAM_D1 DRAM_D2 DRAM_D3 DRAM_D4 DRAM_D5 DRAM_D6 DRAM_D7 DRAM_D8 DRAM_D9 DRAM_D10 DRAM_D11 DRAM_D12 DRAM_D13 DRAM_D14 DRAM_D15 DRAM_D16 DRAM_D17 DRAM_D18 DRAM_D19 DRAM_D20 DRAM_D21 DRAM_D22 DRAM_D23 DRAM_D24 DRAM_D25 DRAM_D26 DRAM_D27 DRAM_D28 DRAM_D29 DRAM_D30 DRAM_D31 DRAM_D32 DRAM_D33 DRAM_D34 DRAM_D35 DRAM_D36 DRAM_D37 DRAM_D38 DRAM_D39 DRAM_D40 DRAM_D41 DRAM_D42 DRAM_D43 DRAM_D44 DRAM_D45 DRAM_D46 DRAM_D47 DRAM_D48 DRAM_D49 DRAM_D50 DRAM_D51 DRAM_D52 DRAM_D53 DRAM_D54 DRAM_D55 DRAM_D56 DRAM_D57 DRAM_D58 DRAM_D59 DRAM_D60 DRAM_D61 DRAM_D62 DRAM_D63 DRAM_DQM0 DRAM_DQM1 DRAM_DQM2 DRAM_DQM3 DRAM_DQM4 DRAM_DQM5 DRAM_DQM6 DRAM_DQM7 DRAM_SDQS0 DRAM_SDQS0_B DRAM_SDQS1 DRAM_SDQS1_B DRAM_SDQS2 DRAM_SDQS2_B DRAM_SDQS3 DRAM_SDQS3_B DRAM_SDQS4 DRAM_SDQS4_B DRAM_SDQS5 DRAM_SDQS5_B DRAM_SDQS6 DRAM_SDQS6_B DRAM_SDQS7 DRAM_SDQS7_B
net class DRAM_A[15..0]: DRAM_A0 DRAM_A1 DRAM_A2 DRAM_A3 DRAM_A4 DRAM_A5 DRAM_A6 DRAM_A7 DRAM_A8 DRAM_A9 DRAM_A10 DRAM_A11 DRAM_A12 DRAM_A13 DRAM_A14 DRAM_A15 DRAM_CAS_B DRAM_CS0_B DRAM_RAS_B DRAM_SDBA0 DRAM_SDBA1 DRAM_SDBA2 DRAM_SDCKE0 DRAM_SDCLK0 DRAM_SDCLK0_B DRAM_SDCLK1 DRAM_SDCLK1_B DRAM_SDODT0 DRAM_WE_B
component class 7-BOARD_EDGE_FINGERS: J2
component class 6-BOOT_SELECT: R44 R45 R46 R47 R48 R49 R50 R51 R52 R53 R54 R55 R56 R57 R58 R59 R60 R61 R62 R63 R64 R65 R66 R67 R68 R69 R70 R71 R72 R73 R74 R75 R76 R77 R78 R79 R80 R81 R82 R83 R84 R85 R86 R87 R88 R89 R90 R91 R92 R93 R94 R95 R96 R97 R98 R99 R100 R101 R102 R103 R104 R105 R106 R107 R108 R109 R110 R111 R112 R113 R114 R115 R116 R117 R118 U12 U13
component class 4-DDR3_MEMORY: C126 C127 C128 C129 C130 C131 C132 C133 C134 C135 C136 C137 C138 C139 C140 C141 C142 C143 C144 C145 C146 C147 C148 C149 C150 C151 C152 C153 C154 C155 C156 C157 C158 C159 C160 C161 C162 C163 C164 C165 C166 C167 C168 C169 C170 C171 C172 C173 C174 C175 C176 C177 C178 C179 C180 C181 C182 C183 C184 C185 C186 C187 C188 C189 C190 C191 R33 R34 R35 R36 R37 R38 R39 R40 R41 SH1 SH2 SH3 SH4 U7 U8 U9 U10
component class 3-CPU_SIGNAL: C109 C110 C111 C112 C113 C114 C115 C116 C117 C118 C119 C120 C121 C122 C123 C124 C125 L5 R8 R11 R12 R13 R14 R15 R16 R17 R18 R19 R20 R21 R22 R23 R24 R25 R26 R27 R28 R29 R30 R31 R32 U3 U14 Y1 Y2
component class 2-CPU_POWER: C38 C39 C40 C41 C42 C43 C44 C45 C46 C47 C48 C49 C50 C51 C52 C53 C54 C55 C56 C57 C58 C59 C60 C61 C62 C63 C64 C65 C66 C67 C68 C69 C70 C71 C72 C73 C74 C75 C76 C77 C78 C79 C80 C81 C82 C83 C84 C85 C86 C87 C88 C89 C90 C91 C92 C93 C94 C95 C96 C97 C98 C99 C100 C101 C102 C103 C104 C105 C106 C107 D2 R10
component class 1-PF0100_PMIC: C1 C2 C3 C4 C5 C6 C7 C8 C9 C10 C11 C12 C13 C14 C15 C16 C17 C18 C19 C20 C21 C22 C23 C24 C25 C26 C27 C28 C29 C30 C31 C32 C33 C34 C35 C36 C37 D1 L1 L2 L3 L4 R1 R2 R3 R4 R5 R6 R7 U1
component class 5-eMMC: C108 C192 C193 C194 C195 C196 C197 C198 R9 R42 U2
differential pair DRAM_SDCLK1: +DRAM_SDCLK1_B -DRAM_SDCLK1
differential pair DRAM_SDCLK0: +DRAM_SDCLK0_B -DRAM_SDCLK0
differential pair DRAM_SDQS7: +DRAM_SDQS7 -DRAM_SDQS7_B
differential pair DRAM_SDQS6: +DRAM_SDQS6 -DRAM_SDQS6_B
differential pair DRAM_SDQS5: +DRAM_SDQS5 -DRAM_SDQS5_B
differential pair DRAM_SDQS4: +DRAM_SDQS4 -DRAM_SDQS4_B
differential pair DRAM_SDQS3: +DRAM_SDQS3 -DRAM_SDQS3_B
differential pair DRAM_SDQS2: +DRAM_SDQS2 -DRAM_SDQS2_B
differential pair DRAM_SDQS1: +DRAM_SDQS1 -DRAM_SDQS1_B
differential pair DRAM_SDQS0: +DRAM_SDQS0 -DRAM_SDQS0_B
differential pair USB-OTG: +USB-OTG_P -USB-OTG_N
differential pair USB-HOST: +USB-HOST_P -USB-HOST_N

## Components (designator, comment, footprint, x,y, rotation, side; value= is the part's Value field where it differs from the comment)
C1 "1uF/10V" 0603_CC 1790.18,727 r90 bottom
C2 "1uF/10V" 0603_CC 1862.17,772.88 r90 top
C3 "0.22uF/6.3V" 0402_CC 1792.88,774.85 r90 bottom
C4 "0.47uF/10V" 0603_CC 1706.27,542.49 r0 bottom
C5 "1uF/10V" 0603_CC 1793.18,659 r90 bottom
C6 "4.7uF/6.3V" 0603_CC 1764.92,442.57 r270 bottom
C7 "1uF/6.3V" 0603_CC 1548.78,518.94 r0 bottom
C8 "0.1uF/10V" 0402_CC 1525.16,495.32 r270 top
C9 "0.1uF/10V" 0402_CC 1759.02,537.45 r0 bottom
C10 "0.1uF/10V" 0402_CC 1497.21,539.42 r0 bottom
C11 "0.47uF/6.3V" 0402_CC 1799.57,537.84 r0 bottom
C12 "0.1uF/10V" 0402_CC 1657.05,537.45 r0 bottom
C13 "4.7uF/10V" 0805_CC 1643.27,446.5 r270 bottom
C14 "22uF/6.3V" 0805_CC 1648,1166.58 r180 bottom
C15 "22uF/6.3V" 0805_CC 1568.86,1166.58 r180 bottom
C16 "22uF/6.3V" 0805_CC 1804.69,1166.58 r180 bottom
C17 "22uF/6.3V" 0805_CC 1726.34,1166.58 r180 bottom
C18 "0.1uF/10V" 0402_CC 1638.94,848.86 r180 bottom
C19 "4.7uF/10V" 0805_CC 1647.21,935.87 r0 bottom
C20 "22uF/6.3V" 0805_CC 1596.81,242.57 r0 bottom
C21 "22uF/6.3V" 0805_CC 1675.95,242.96 r0 bottom
C22 "22uF/6.3V" 0805_CC 1755.08,242.57 r0 bottom
C23 "22uF/6.3V" 0805_CC 1835,242.57 r0 bottom
C24 "0.1uF/10V" 0402_CC 1596.81,848.86 r180 bottom
C25 "4.7uF/10V" 0805_CC 1568.07,935.87 r0 bottom
C26 "4.7uF/10V" 0805_CC 1593,436.24 r90 bottom
C27 "0.1uF/10V" 0402_CC 1607.44,537.84 r0 bottom
C28 "22uF/6.3V" 0805_CC 1383.43,1166.19 r180 bottom
C29 "22uF/6.3V" 0805_CC 1462.96,1165.79 r180 bottom
C30 "0.1uF/10V" 0402_CC 1554.69,848.47 r180 bottom
C31 "4.7uF/10V" 0805_CC 1490.12,935.48 r0 bottom
C32 "0.1uF/10V" 0402_CC 1485.64,723.67 r270 bottom
C33 "22uF/6.3V" 0805_CC 1486.58,244.14 r0 bottom
C34 "22uF/6.3V" 0805_CC 1407.84,244.14 r0 bottom
C35 "0.1uF/10V" 0402_CC 1485.64,644.93 r270 bottom
C36 "4.7uF/10V" 0805_CC 1421.22,603.59 r180 bottom
C37 "0.1uF/10V" 0402_CC 1764.14,605.56 r270 bottom
C38 "0.22uF/6.3V" 0201_CC 669.83,1491.75 r90 bottom
C39 "0.22uF/6.3V" 0201_CC 669.83,1523.25 r90 bottom
C40 "0.22uF/6.3V" 0201_CC 609.2,1460.26 r90 bottom
C41 "0.22uF/6.3V" 0201_CC 670.23,1460.26 r90 bottom
C42 "22uF/4V" 0603_CC 632.09,1381.12 r270 bottom
C43 "0.22uF/6.3V" 0201_CC 551.72,1428.76 r90 bottom
C44 "0.22uF/6.3V" 0201_CC 546.21,1334.27 r90 bottom
C45 "0.22uF/6.3V" 0201_CC 743.3,1428.76 r270 bottom
C46 "0.22uF/6.3V" 0201_CC 743.3,1523.25 r270 bottom
C47 "0.22uF/6.3V" 0201_CC 743.3,1460.26 r270 bottom
C48 "0.22uF/6.3V" 0201_CC 743.3,1491.75 r270 bottom
C49 "22uF/4V" 0603_CC 539.28,1381.12 r270 bottom
C50 "0.22uF/6.3V" 0201_CC 675.24,1333.85 r90 bottom
C51 "0.22uF/6.3V" 0201_CC 607.38,1333 r270 bottom
C52 "0.22uF/6.3V" 0201_CC 609.2,1491.75 r90 bottom
C53 "0.22uF/6.3V" 0201_CC 608.81,1428.76 r90 bottom
C54 "22uF/4V" 0603_CC 707.24,1483.88 r180 bottom
C55 "0.22uF/6.3V" 0201_CC 743.3,1554.75 r270 bottom
C56 "0.22uF/6.3V" 0201_CC 746.61,1334.27 r270 bottom
C57 "0.22uF/6.3V" 0201_CC 546.61,1302.78 r90 bottom
C58 "0.22uF/6.3V" 0201_CC 546.61,1271.28 r90 bottom
C59 "22uF/4V" 0603_CC 707.24,1522.46 r0 bottom
C60 "0.22uF/6.3V" 0201_CC 671.02,1303.17 r90 bottom
C61 "0.22uF/6.3V" 0201_CC 588.34,1271.28 r270 bottom
C62 "0.22uF/6.3V" 0201_CC 672.2,1271.28 r90 bottom
C63 "0.22uF/6.3V" 0201_CC 588.34,1302.78 r270 bottom
C64 "0.22uF/6.3V" 0201_CC 748.97,1302.78 r270 bottom
C65 "0.22uF/6.3V" 0201_CC 748.97,1271.28 r270 bottom
C66 "22uF/4V" 0603_CC 711.17,1282.7 r0 bottom
C67 "0.22uF/6.3V" 0201_CC 809.2,1270.89 r270 bottom
C68 "0.22uF/6.3V" 0201_CC 809.2,1428.76 r90 bottom
C69 "0.22uF/6.3V" 0201_CC 809.2,1491.75 r90 bottom
C70 "0.22uF/6.3V" 0201_CC 809.2,1523.25 r90 bottom
C71 "0.22uF/6.3V" 0201_CC 809.2,1554.75 r90 bottom
C72 "0.22uF/6.3V" 0201_CC 809.2,1460.26 r90 bottom
C73 "0.22uF/6.3V" 0201_CC 809.2,1302.78 r270 bottom
C74 "0.22uF/6.3V" 0201_CC 809.6,1334.27 r270 bottom
C75 "22uF/4V" 0603_CC 810.78,1381.52 r90 bottom
C76 "22uF/4V" 0603_CC 1201.26,1291.05 r270 bottom
C77 "22uF/4V" 0603_CC 1201.26,1291.05 r90 top
C78 "0.22uF/6.3V" 0201_CC 841.09,1554.75 r270 bottom
C79 "0.22uF/6.3V" 0201_CC 832.04,1428.76 r270 bottom
C80 "0.22uF/6.3V" 0201_CC 840.7,1523.25 r270 bottom
C81 "0.22uF/6.3V" 0201_CC 832.04,1491.75 r270 bottom
C82 "0.22uF/6.3V" 0201_CC 832.04,1460.26 r270 bottom
C83 "22uF/4V" 0603_CC 851.33,1381.52 r270 bottom
C84 "0.22uF/6.3V" 0201_CC 557.24,1547.27 r180 bottom
C85 "22uF/6.3V" 0805_CC 665,1930 r90 top
C86 "0.22uF/6.3V" 0201_CC 509.2,1473.64 r270 bottom
C87 "0.22uF/6.3V" 0201_CC 486.76,1428.76 r270 bottom
C88 "0.22uF/6.3V" 0201_CC 659.2,1612.23 r180 bottom
C89 "10uF/6.3V" 0805_CC 358.81,1582.7 r90 bottom
C90 "0.22uF/6.3V" 0201_CC 614.72,1590.18 r270 bottom
C91 "0.22uF/6.3V" 0201_CC 569.05,1590.18 r270 bottom
C92 "0.22uF/6.3V" 0201_CC 756.45,1598.05 r180 bottom
C93 "0.22uF/6.3V" 0201_CC 896.21,1491.75 r90 bottom
C94 "0.22uF/6.3V" 0201_CC 614.32,1614.19 r270 bottom
C95 "0.22uF/6.3V" 0201_CC 895.82,1428.37 r90 bottom
C96 "22uF/6.3V" 0805_CC 1226.23,1358.24 r180 top
C97 "22uF/6.3V" 0805_CC 209.13,1255.61 r270 top
C98 "0.22uF/6.3V" 0201_CC 819.44,1598.05 r180 bottom
C99 "0.22uF/6.3V" 0201_CC 787.95,1598.05 r180 bottom
C100 "0.22uF/6.3V" 0201_CC 500.15,1677.58 r90 bottom
C101 "10uF/6.3V" 0805_CC 497,1760.1 r0 bottom
C102 "0.22uF/6.3V" 0201_CC 887.16,1608.68 r180 bottom
C103 "0.22uF/6.3V" 0201_CC 896.21,1460.26 r90 bottom
C104 "0.22uF/6.3V" 0201_CC 486.76,1365.77 r270 bottom
C105 "0.22uF/6.3V" 0201_CC 509.6,1527.19 r270 bottom
C106 "0.22uF/6.3V" 0201_CC 509.6,1551.6 r270 bottom
C107 "0.22uF/6.3V" 0201_CC 841.09,1582.7 r270 bottom
C108 "4.7uF/6.3V" 0603_CC 1751.97,1874.02 r0 bottom
C109 "0.22uF/6.3V" 0201_CC 719.83,1620.1 r0 bottom
C110 "0.22uF/6.3V" 0201_CC 697,1620.1 r0 bottom
C111 "0.22uF/10V" 0402_CC 634.33,1854.04 r0 bottom
C112 "0.1uF/10V" 0402_CC 165.9,1480.34 r270 bottom
C113 "0.22uF/6.3V" 0201_CC 485.98,1456.71 r90 bottom
C114 "10uF/6.3V" 0805_CC 807.55,1944.59 r270 bottom
C115 "0.22uF/6.3V" 0201_CC 569.44,1614.19 r270 bottom
C116 "0.22uF/6.3V" 0201_CC 463.54,1432.7 r90 bottom
C117 "18pF/16V" 0402_CC 491.7,1882.4 r270 bottom
C118 "18pF/16V" 0402_CC 430.24,1882.28 r270 top
C119 "18pF/16V" 0402_CC 594.9,2103.6 r90 bottom
C120 "18pF/16V" 0402_CC 503.6,2103.6 r270 bottom
C121 "0.22uF/10V" 0402_CC 681.57,1854.04 r0 bottom
C122 "0.22uF/6.3V" 0201_CC 509.2,1578.37 r270 bottom
C123 "0.22uF/6.3V" 0201_CC 478.1,1203.96 r270 bottom
C124 "0.22uF/6.3V" 0201_CC 499,1629.98 r0 bottom
C125 "0.22uF/6.3V" 0201_CC 470.62,1621.67 r90 bottom
C126 "0.22uF/6.3V" 0402_CC 843.38,244.94 r270 bottom
C127 "0.22uF/6.3V" 0402_CC 1210.38,563.08 r0 bottom
C128 "0.22uF/6.3V" 0402_CC 189.45,422.58 r0 bottom
C129 "0.22uF/6.3V" 0402_CC 588.14,244.94 r90 bottom
C130 "0.1uF/6.3V" 0402_CC 320.82,1091.72 r315 bottom
C131 "0.22uF/6.3V" 0402_CC 757.83,595.65 r180 top
C132 "0.22uF/6.3V" 0402_CC 190.19,583.84 r180 top
C133 "0.22uF/6.3V" 0402_CC 1210.38,454.1 r0 top
C134 "0.22uF/6.3V" 0402_CC 1210.38,626.58 r180 top
C135 "0.22uF/6.3V" 0402_CC 1210.38,592.1 r0 top
C136 "0.22uF/6.3V" 0402_CC 1210.38,327.35 r0 top
C137 "0.22uF/6.3V" 0402_CC 843.38,244.94 r90 top
C138 "0.22uF/6.3V" 0402_CC 1210.38,390.35 r0 top
C139 "0.22uF/6.3V" 0402_CC 1210.38,707.58 r180 top
C140 "0.22uF/6.3V" 0402_CC 212.55,986.6 r90 bottom
C141 "0.22uF/6.3V" 0402_CC 212.55,1029.91 r90 bottom
C142 "0.22uF/6.3V" 0402_CC 1210.38,770.58 r0 bottom
C143 "0.22uF/6.3V" 0402_CC 1236.69,1066.64 r90 bottom
C144 "22uF/6.3V" 0805_CC 131.84,788.57 r0 top
C145 "22uF/6.3V" 0805_CC 1290,625.24 r0 top
C146 "0.22uF/6.3V" 0402_CC 189.45,451.1 r0 top
C147 "0.22uF/6.3V" 0402_CC 189.7,643.58 r180 top
C148 "0.22uF/6.3V" 0402_CC 189.45,390.1 r0 top
C149 "0.22uF/6.3V" 0402_CC 189.45,318.1 r0 top
C150 "0.22uF/6.3V" 0402_CC 190.14,485.34 r270 top
C151 "0.22uF/6.3V" 0402_CC 189.7,709.58 r180 top
C152 "0.22uF/6.3V" 0402_CC 1210.38,770.58 r180 top
C153 "0.22uF/6.3V" 0402_CC 1095.62,855.34 r90 top
C154 "0.22uF/6.3V" 0402_CC 189.45,722.58 r0 bottom
C155 "0.22uF/6.3V" 0402_CC 189.45,568.58 r0 bottom
C156 "0.22uF/6.3V" 0402_CC 189.45,690.1 r180 bottom
C157 "0.22uF/6.3V" 0402_CC 189.38,390.1 r180 bottom
C158 "0.22uF/6.3V" 0402_CC 189.38,326.6 r180 bottom
C159 "0.22uF/6.3V" 0402_CC 1236.69,1019.39 r90 bottom
C160 "0.22uF/6.3V" 0402_CC 873.14,855.34 r90 bottom
C161 "0.22uF/6.3V" 0402_CC 1210.38,707.58 r0 bottom
C162 "0.22uF/6.3V" 0402_CC 1210.38,627.08 r0 bottom
C163 "0.22uF/6.3V" 0402_CC 1211.38,527.1 r180 bottom
C164 "0.22uF/6.3V" 0402_CC 1210.38,390.35 r180 bottom
C165 "22uF/6.3V" 0805_CC 1214.52,1016.91 r180 top
C166 "0.22uF/6.3V" 0402_CC 588.14,244.94 r270 top
C167 "0.22uF/6.3V" 0402_CC 526.69,853.74 r90 top
C168 "0.22uF/6.3V" 0402_CC 758.38,713.58 r180 top
C169 "0.22uF/6.3V" 0402_CC 758.38,653.58 r180 top
C170 "0.22uF/6.3V" 0402_CC 189.45,771.58 r180 top
C171 "0.22uF/6.3V" 0402_CC 758.38,773.58 r180 top
C172 "0.22uF/6.3V" 0201_CC 872.39,1240.14 r270 bottom
C173 "0.22uF/6.3V" 0201_CC 629.87,1211.8 r180 bottom
C174 "0.22uF/6.3V" 0201_CC 851.13,1216.91 r180 bottom
C175 "0.22uF/6.3V" 0201_CC 819.24,1216.91 r180 bottom
C176 "0.22uF/6.3V" 0201_CC 787.75,1217.31 r180 bottom
C177 "0.22uF/6.3V" 0201_CC 598.77,1218.88 r180 bottom
C178 "0.22uF/6.3V" 0402_CC 529.62,853.74 r270 bottom
C179 "0.22uF/6.3V" 0402_CC 637.41,328.87 r0 bottom
C180 "0.22uF/6.3V" 0402_CC 1210.38,327.35 r180 bottom
C181 "0.22uF/6.3V" 0402_CC 306.14,855.27 r90 bottom
C182 "22uF/6.3V" 0805_CC 1268.38,343.05 r0 top
C183 "22uF/6.3V" 0805_CC 223.38,223.05 r90 top
C184 "22uF/6.3V" 0805_CC 133.38,383.05 r0 top
C185 "0.22uF/6.3V" 0201_CC 661.76,1218.88 r180 bottom
C186 "0.22uF/6.3V" 0201_CC 630.27,1235.02 r0 bottom
C187 "0.22uF/6.3V" 0201_CC 872.39,1303.14 r270 bottom
C188 "0.22uF/6.3V" 0201_CC 872.39,1271.64 r270 bottom
C189 "0.22uF/6.3V" 0201_CC 567.28,1218.88 r180 bottom
C190 "22uF/4V" 0603_CC 710.78,1244.12 r180 bottom
C191 "22uF/4V" 0603_CC 198.18,983.75 r180 top
C192 "4.7uF/6.3V" 0603_CC 1811.02,1874.02 r0 bottom
C193 "0.1uF/10V" 0402_CC 1559.06,1960.63 r90 bottom
C194 "0.1uF/10V" 0402_CC 1625.98,1992.13 r90 bottom
C195 "0.1uF/10V" 0402_CC 1488.19,1944.88 r0 bottom
C196 "0.1uF/10V" 0402_CC 1452.72,1913.39 r180 bottom
C197 "0.1uF/10V" 0402_CC 1716.54,1811.02 r180 bottom
C198 "0.1uF/10V" 0402_CC 1452.76,1814.96 r0 bottom
D1 "LED GREEN" LED0603 1688,131 r90 top
D2 "NSR0320" SOD323 735,2020 r0 top
J2 "CONN-A" CON-1.27-SMT 2114.17,1122.05 r270 bottom locked
L1 "1uH/2.65A" IND-1uH-2.65A 1711.38,340.2 r180 top
L2 "1uH/2.65A" IND-1uH-2.65A 1680.28,1068.94 r0 top
L3 "1uH/2.65A" IND-1uH-2.65A 1431.07,1067.76 r0 top
L4 "1uH/2.65A" IND-1uH-2.65A 1452.72,338.23 r180 top
L5 "100omh/100Mhz" 0603_CC 295.82,1665.38 r270 bottom
R1 "150K(DNP)" 0402_CC 1770.05,898.34 r270 bottom
R2 "0" 0402_CC 1710.09,928.06 r0 top
R3 "270" 0402_CC 1599,130 r90 top
R4 "0(DNP)" 0402_CC 1765.32,927.99 r0 top
R5 "100K" 0402_CC 1905.08,646.5 r270 top
R6 "DNP" 0402_CC 1841,590 r0 bottom
R7 "68K" 0402_CC 1813.34,898.47 r180 top
R8 "10K" 0402_CC 1224.52,1145 r270 top
R9 "10K" 0402_CC 1665.35,1895.66 r180 bottom
R10 "0" 0603_CC 1237.1,1549.6 r270 top
R11 "10K" 0402_CC 1224.52,1190 r270 top
R12 "1.1K" 0402_CC 165.9,1433.09 r270 bottom
R13 "10K" 0402_CC 1224.52,1235 r270 top
R14 "1.1K" 0402_CC 165.9,1433.09 r90 top
R15 "1.1K" 0402_CC 165.9,1385.85 r270 bottom
R16 "1.1K" 0402_CC 165.9,1338.6 r270 bottom
R17 "1.1K" 0402_CC 165.9,1338.6 r90 top
R18 "1.1K" 0402_CC 165.9,1385.85 r90 top
R19 "6.04K/1%" 0402_CC 195.42,1622.07 r90 bottom
R20 "6.04K/1%" 0402_CC 195.42,1622.07 r270 top
R21 "10K" 0402_CC 195.42,1669.31 r270 top
R22 "10K" 0402_CC 195.42,1574.82 r90 bottom
R23 "10K" 0402_CC 195.42,1669.31 r90 bottom
R24 "191/1%" 0402_CC 709.08,1732 r0 bottom
R25 "4.7K" 0402_CC 165.9,1574.82 r90 top
R26 "47K" 0402_CC 195.42,1480.34 r270 top
R27 "10M(DNP)" 0402_CC 491.66,1882.28 r270 top
R28 "10M(DNP)" 0402_CC 579.9,1943.2 r90 bottom
R29 "0" 0402_CC 195.42,1527.58 r270 top
R30 "2.2M" 0402_CC 558.2,1881.89 r270 top
R31 "1.6K/1%" 0402_CC 195.42,1527.58 r90 bottom
R32 "200/1%" 0402_CC 235,1790 r270 top
R33 "200/1%" 0402_CC 1210.38,526.6 r0 top
R34 "200/1%" 0402_CC 189.45,553.1 r0 top
R35 "240/1%" 0402_CC 641.1,559.1 r0 top
R36 "240/1%" 0402_CC 160.62,485.34 r270 bottom
R37 "10K/1%" 0402_CC 641.34,538.24 r180 bottom
R38 "10K/1%" 0402_CC 272.99,976.95 r0 bottom
R39 "240/1%" 0402_CC 758.7,563.1 r0 top
R40 "240/1%" 0402_CC 824.38,959.1 r0 top
R41 "240/1%" 0402_CC 1251.38,424.58 r180 top
R42 "10K" 0402_CC 1570.87,1866.14 r90 bottom
R44 "DNP" 0402_CC 272.17,1900.59 r180 top
R45 "4.7K" 0402_CC 228.86,1900.59 r180 top
R46 "DNP" 0402_CC 315.48,1900.59 r180 top
R47 "DNP" 0402_CC 358.78,1900.59 r180 top
R48 "DNP" 0402_CC 1453.52,1395.46 r270 top
R49 "0" 0402_CC 1453.52,1482.08 r270 top
R50 "0" 0402_CC 1644.51,1525.37 r270 top
R51 "DNP" 0402_CC 1644.51,1568.68 r270 top
R52 "DNP" 0402_CC 1453.52,1612 r270 top
R53 "DNP" 0402_CC 1644.52,1611.98 r270 top
R54 "DNP" 0402_CC 1453.52,1568.69 r270 top
R55 "DNP" 0402_CC 1644.51,1482.06 r270 top
R56 "DNP" 0402_CC 1453.52,1308.85 r270 top
R57 "DNP" 0402_CC 1453.52,1352.16 r270 top
R58 "0" 0402_CC 1644.51,1438.76 r270 top
R59 "0" 0402_CC 1453.52,1438.77 r270 top
R60 "0" 0402_CC 1644.51,1308.83 r270 top
R61 "DNP" 0402_CC 1644.51,1395.45 r270 top
R62 "DNP" 0402_CC 1644.51,1352.14 r270 top
R63 "DNP" 0402_CC 1453.52,1525.39 r270 top
R64 "DNP" 0402_CC 228.86,1930.11 r180 bottom
R65 "DNP" 0402_CC 315.48,1930.11 r180 bottom
R66 "DNP" 0402_CC 358.78,1930.11 r180 bottom
R67 "4.7K" 0402_CC 272.17,1930.11 r180 bottom
R68 "10k" 0402_CC 1614.99,1482.06 r270 bottom
R69 "4.7K" 0402_CC 1538.86,1482.06 r90 top
R70 "10k" 0402_CC 1424,1568.69 r270 bottom
R71 "4.7K" 0402_CC 1347.87,1568.69 r90 top
R72 "10k" 0402_CC 1615,1611.98 r270 bottom
R73 "4.7K" 0402_CC 1538.87,1611.98 r90 top
R74 "10k" 0402_CC 1424,1612 r270 bottom
R75 "4.7K" 0402_CC 1347.87,1612 r90 top
R76 "10k" 0402_CC 1614.99,1568.68 r270 bottom
R77 "4.7K" 0402_CC 1538.86,1568.68 r90 top
R78 "10k" 0402_CC 1614.99,1525.37 r270 bottom
R79 "4.7K" 0402_CC 1538.86,1525.37 r90 top
R80 "10k" 0402_CC 1424,1482.08 r270 bottom
R81 "4.7K" 0402_CC 1347.87,1482.08 r90 top
R82 "100K" 0402_CC 105,1825 r90 top
R83 "10k" 0402_CC 1424,1395.46 r270 bottom
R84 "4.7K" 0402_CC 1347.87,1395.46 r90 top
R85 "10k" 0402_CC 1424,1525.39 r270 bottom
R86 "4.7K" 0402_CC 1347.87,1525.39 r90 top
R87 "10k" 0402_CC 1614.99,1352.14 r270 bottom
R88 "4.7K" 0402_CC 1538.86,1352.14 r90 top
R89 "10k" 0402_CC 1614.99,1395.45 r270 bottom
R90 "4.7K" 0402_CC 1538.86,1395.45 r90 top
R91 "10k" 0402_CC 1614.99,1308.83 r270 bottom
R92 "4.7K" 0402_CC 1538.86,1308.83 r90 top
R93 "10k" 0402_CC 1424,1438.77 r270 bottom
R94 "4.7K" 0402_CC 1347.87,1438.77 r90 top
R95 "4.7K" 0402_CC 135,1935 r90 bottom
R96 "10k" 0402_CC 1614.99,1438.76 r270 bottom
R97 "4.7K" 0402_CC 1538.86,1438.76 r90 top
R98 "10k" 0402_CC 1424,1352.16 r270 bottom
R99 "4.7K" 0402_CC 1347.87,1352.16 r90 top
R100 "10k" 0402_CC 1424,1308.85 r270 bottom
R101 "4.7K" 0402_CC 1347.87,1308.85 r90 top
R102 "10K" 0402_CC 1751.11,1482.05 r270 bottom
R103 "10K" 0402_CC 1751.11,1525.35 r90 top
R104 "10K" 0402_CC 1751.11,1438.74 r90 top
R105 "10K" 0402_CC 1751.11,1525.35 r270 bottom
R106 "4.7K" 0402_CC 350,2055 r0 bottom
R107 "10K" 0402_CC 1751.11,1438.74 r270 bottom
R108 "10K" 0402_CC 1751.11,1482.05 r90 top
R109 "10K" 0402_CC 1751.11,1568.66 r90 top
R110 "10K" 0402_CC 1751.11,1352.13 r270 bottom
R111 "10K" 0402_CC 1751.11,1568.66 r270 bottom
R112 "10K" 0402_CC 1751.11,1308.82 r90 top
R113 "10K" 0402_CC 1751.11,1395.43 r90 top
R114 "10K" 0402_CC 1751.11,1352.13 r90 top
R115 "10K" 0402_CC 1751.11,1395.43 r270 bottom
R116 "10K" 0402_CC 1751.11,1308.82 r270 bottom
R117 "10K" 0402_CC 1751.11,1611.97 r270 bottom
R118 "10K" 0402_CC 1751.11,1611.97 r90 top
SH1 "0" 0201_CC 779.38,962.85 r0 top
SH2 "0" 0201_CC 754.38,962.85 r0 top
SH3 "0" 0201_CC 704.38,962.85 r0 top
SH4 "0" 0201_CC 729.38,962.85 r0 top
U1 "MMPF0100F0ZES" QFN-56 1765.32,845.79 r90 top
U2 "GD9E4M00PNF" EMMC-153 1429.13,1807.09 r90 top locked
U3 "MCIMX6Q5EYM10AD" FCPBGA 693.38,1397.34 r90 top
U7 "MT41K128M16JT" BGA96 542.43,785.57 r90 bottom
U8 "MT41K128M16JT" BGA96 290.46,785.57 r90 top
U9 "MT41K128M16JT" BGA96 1109.36,785.57 r90 bottom
U10 "MT41K128M16JT" BGA96 857.39,785.57 r90 top
U12 "NC7SP126P5X" SC70 160,1885 r90 top
U13 "NC7SP125P5X" SC70 298.89,2019.96 r0 top
U14 "STM6315RAW13F" SOT143-4 1866.61,1483.96 r0 top
Y1 "24MHz" XTAL4_SX_3225 527.32,2029.94 r180 top
Y2 "32.768KHZ" XTAL2-3P2X1P5-SM 599.8,2017.8 r180 bottom

## Footprints (in the part's own frame and the unit in brackets; to place one, negate y for a bottom-side part, rotate by r counter-clockwise, add the part's x,y. Pads: shape width x height; smd on the part's side, far side on the other; paste and mask are expansions set on the pad)
0201_CC [mil]
  rect 12x12 smd: 1(0,0) 2(0,-21.02)
0402_CC [mil]
  rect 20x18 smd: 1(0,0) 2(0,-29.52)
  silkscreen extent -18,-35 18,6
0603_CC [mil]
  rect 33x28 smd: 1(0,0) 2(0,-51.18)
  silkscreen extent -25,-66 25,15
0805_CC [mil]
  rect 53x37 smd: 1(0,0) 2(0,-61.42)
  silkscreen extent -36,-81 36,20
BGA96 [mil]
  round 14 smd: A1(0,0) A2(0,-31.49) A3(0,-62.99) A7(0,-188.97) A8(0,-220.47) A9(0,-251.96) B1(-31.5,0) B2(-31.5,-31.49) B3(-31.5,-62.99) B7(-31.5,-188.97) B8(-31.5,-220.47) B9(-31.5,-251.96) C1(-62.99,0) C2(-62.99,-31.49) C3(-62.99,-62.99) C7(-62.99,-188.97) C8(-62.99,-220.47) C9(-62.99,-251.96) D1(-94.49,0) D2(-94.49,-31.49) D3(-94.49,-62.99) D7(-94.49,-188.97) D8(-94.49,-220.47) D9(-94.49,-251.96) E1(-125.98,0) E2(-125.98,-31.49) E3(-125.98,-62.99) E7(-125.98,-188.97) E8(-125.98,-220.47) E9(-125.98,-251.96) F1(-157.48,0) F2(-157.48,-31.49) F3(-157.48,-62.99) F7(-157.48,-188.97) F8(-157.48,-220.47) F9(-157.48,-251.96) G1(-188.98,0) G2(-188.98,-31.49) G3(-188.98,-62.99) G7(-188.98,-188.97) G8(-188.98,-220.47) G9(-188.98,-251.96) H1(-220.47,0) H2(-220.47,-31.49) H3(-220.47,-62.99) H7(-220.47,-188.97) H8(-220.47,-220.47) H9(-220.47,-251.96) J1(-251.97,0) J2(-251.97,-31.49) J3(-251.97,-62.99) J7(-251.97,-188.97) J8(-251.97,-220.47) J9(-251.97,-251.96) K1(-283.46,0) K2(-283.46,-31.49) K3(-283.46,-62.99) K7(-283.46,-188.97) K8(-283.46,-220.47) K9(-283.46,-251.96) L1(-314.96,0) L2(-314.96,-31.49) L3(-314.96,-62.99) L7(-314.96,-188.97) L8(-314.96,-220.47) L9(-314.96,-251.96) M1(-346.46,0) M2(-346.46,-31.49) M3(-346.46,-62.99) M7(-346.46,-188.97) M8(-346.46,-220.47) M9(-346.46,-251.96) N1(-377.95,0) N2(-377.95,-31.49) N3(-377.95,-62.99) N7(-377.95,-188.97) N8(-377.95,-220.47) N9(-377.95,-251.96) P1(-409.45,0) P2(-409.45,-31.49) P3(-409.45,-62.99) P7(-409.45,-188.97) P8(-409.45,-220.47) P9(-409.45,-251.96) R1(-440.94,0) R2(-440.94,-31.49) R3(-440.94,-62.99) R7(-440.94,-188.97) R8(-440.94,-220.47) R9(-440.94,-251.96) T1(-472.44,0) T2(-472.44,-31.49) T3(-472.44,-62.99) T7(-472.44,-188.97) T8(-472.44,-220.47) T9(-472.44,-251.96)
  silkscreen extent -522,-293 49,41
CON-1.27-SMT [mm]
  oval 0.76x2.05 smd: 1(-18.415,1.875)
  rect 0.76x2.05 smd: 2(-18.415,-1.875) 3(-17.145,1.875) 4(-17.145,-1.875) 5(-15.875,1.875) 6(-15.875,-1.875) 7(-14.605,1.875) 8(-14.605,-1.875) 9(-13.335,1.875) 10(-13.335,-1.875) 11(-12.065,1.875) 12(-12.065,-1.875) 13(-10.795,1.875) 14(-10.795,-1.875) 15(-9.525,1.875) 16(-9.525,-1.875) 17(-8.255,1.875) 18(-8.255,-1.875) 19(-6.985,1.875) 20(-6.985,-1.875) 21(-5.715,1.875) 22(-5.715,-1.875) 23(-4.445,1.875) 24(-4.445,-1.875) 25(-3.175,1.875) 26(-3.175,-1.875) 27(-1.905,1.875) 28(-1.905,-1.875) 29(-0.635,1.875) 30(-0.635,-1.875) 31(0.635,1.875) 32(0.635,-1.875) 33(1.905,1.875) 34(1.905,-1.875) 35(3.175,1.875) 36(3.175,-1.875) 37(4.445,1.875) 38(4.445,-1.875) 39(5.715,1.875) 40(5.715,-1.875) 41(6.985,1.875) 42(6.985,-1.875) 43(8.255,1.875) 44(8.255,-1.875) 45(9.525,1.875) 46(9.525,-1.875) 47(10.795,1.875) 48(10.795,-1.875) 49(12.065,1.875) 50(12.065,-1.875) 51(13.335,1.875) 52(13.335,-1.875) 53(14.605,1.875) 54(14.605,-1.875) 55(15.875,1.875) 56(15.875,-1.875) 57(17.145,1.875) 58(17.145,-1.875) 59(18.415,1.875) 60(18.415,-1.875)
  silkscreen extent -19.42,-3.37 19.34,3.37
EMMC-153 [mil]
  round 10 smd: A1(0,0) A2(19.68,0) A3(39.37,0) A4(59.05,0) A5(78.74,0) A6(98.42,0) A7(118.11,0) A8(137.79,0) A9(157.48,0) A10(177.16,0) A11(196.85,0) A12(216.53,0) A13(236.22,0) A14(255.9,0) B1(0,-19.69) B2(19.68,-19.69) B3(39.37,-19.69) B4(59.05,-19.69) B5(78.74,-19.69) B6(98.42,-19.69) B7(118.11,-19.69) B8(137.79,-19.69) B9(157.48,-19.69) B10(177.16,-19.69) B11(196.85,-19.69) B12(216.53,-19.69) B13(236.22,-19.69) B14(255.9,-19.69) C1(0,-39.37) C2(19.68,-39.37) C3(39.37,-39.37) C4(59.05,-39.37) C5(78.74,-39.37) C6(98.42,-39.37) C7(118.11,-39.37) C8(137.79,-39.37) C9(157.48,-39.37) C10(177.16,-39.37) C11(196.85,-39.37) C12(216.53,-39.37) C13(236.22,-39.37) C14(255.9,-39.37) D1(0,-59.06) D2(19.68,-59.06) D3(39.37,-59.06) D4(59.05,-59.06) D12(216.53,-59.06) D13(236.22,-59.06) D14(255.9,-59.06) E1(0,-78.74) E2(19.68,-78.74) E3(39.37,-78.74) E5(78.74,-78.74) E6(98.42,-78.74) E7(118.11,-78.74) E8(137.79,-78.74) E9(157.48,-78.74) E10(177.16,-78.74) E12(216.53,-78.74) E13(236.22,-78.74) E14(255.9,-78.74) F1(0,-98.43) F2(19.68,-98.43) F3(39.37,-98.43) F5(78.74,-98.43) F10(177.16,-98.43) F12(216.53,-98.43) F13(236.22,-98.43) F14(255.9,-98.43) G1(0,-118.11) G2(19.68,-118.11) G3(39.37,-118.11) G5(78.74,-118.11) G10(177.16,-118.11) G12(216.53,-118.11) G13(236.22,-118.11) G14(255.9,-118.11) H1(0,-137.8) H2(19.68,-137.8) H3(39.37,-137.8) H5(78.74,-137.8) H10(177.16,-137.8) H12(216.53,-137.8) H13(236.22,-137.8) H14(255.9,-137.8) J1(0,-157.48) J2(19.68,-157.48) J3(39.37,-157.48) J5(78.74,-157.48) J10(177.16,-157.48) J12(216.53,-157.48) J13(236.22,-157.48) J14(255.9,-157.48) K1(0,-177.17) K2(19.68,-177.17) K3(39.37,-177.17) K5(78.74,-177.17) K6(98.42,-177.17) K7(118.11,-177.17) K8(137.79,-177.17) K9(157.48,-177.17) K10(177.16,-177.17) K12(216.53,-177.17) K13(236.22,-177.17) K14(255.9,-177.17) L1(0,-196.85) L2(19.68,-196.85) L3(39.37,-196.85) L12(216.53,-196.85) L13(236.22,-196.85) L14(255.9,-196.85) M1(0,-216.54) M2(19.68,-216.54) M3(39.37,-216.54) M4(59.05,-216.54) M5(78.74,-216.54) M6(98.42,-216.54) M7(118.11,-216.54) M8(137.79,-216.54) M9(157.48,-216.54) M10(177.16,-216.54) M11(196.85,-216.54) M12(216.53,-216.54) M13(236.22,-216.54) M14(255.9,-216.54) N1(0,-236.22) N2(19.68,-236.22) N3(39.37,-236.22) N4(59.05,-236.22) N5(78.74,-236.22) N6(98.42,-236.22) N7(118.11,-236.22) N8(137.79,-236.22) N9(157.48,-236.22) N10(177.16,-236.22) N11(196.85,-236.22) N12(216.53,-236.22) N13(236.22,-236.22) N14(255.9,-236.22) P1(0,-255.91) P2(19.68,-255.91) P3(39.37,-255.91) P4(59.05,-255.91) P5(78.74,-255.91) P6(98.42,-255.91) P7(118.11,-255.91) P8(137.79,-255.91) P9(157.48,-255.91) P10(177.16,-255.91) P11(196.85,-255.91) P12(216.53,-255.91) P13(236.22,-255.91) P14(255.9,-255.91)
  silkscreen extent -100,-384 356,128
FCPBGA [mil]
  round 16 smd: A2(377.95,346.46) A3(377.95,314.96) A4(377.95,283.46) A5(377.95,251.97) A6(377.95,220.47) A7(377.95,188.98) A8(377.95,157.48) A9(377.95,125.98) A10(377.95,94.49) A11(377.95,62.99) A12(377.95,31.5) A13(377.95,0) A14(377.95,-31.5) A15(377.95,-62.99) A16(377.95,-94.49) A17(377.95,-125.98) A18(377.95,-157.48) A19(377.95,-188.98) A20(377.95,-220.47) A21(377.95,-251.97) A22(377.95,-283.46) A23(377.95,-314.96) A24(377.95,-346.46) A25(377.95,-377.95) AA1(-251.97,377.95) AA2(-251.97,346.46) AA3(-251.97,314.96) AA4(-251.97,283.46) AA5(-251.97,251.97) AA6(-251.97,220.47) AA7(-251.97,188.98) AA8(-251.97,157.48) AA9(-251.97,125.98) AA10(-251.97,94.49) AA11(-251.97,62.99) AA12(-251.97,31.5) AA13(-251.97,0) AA14(-251.97,-31.5) AA15(-251.97,-62.99) AA16(-251.97,-94.49) AA17(-251.97,-125.98) AA18(-251.97,-157.48) AA19(-251.97,-188.98) AA20(-251.97,-220.47) AA21(-251.97,-251.97) AA22(-251.97,-283.46) AA23(-251.97,-314.96) AA24(-251.97,-346.46) AA25(-251.97,-377.95) AB1(-283.46,377.95) AB2(-283.46,346.46) AB3(-283.46,314.96) AB4(-283.46,283.46) AB5(-283.46,251.97) AB6(-283.46,220.47) AB7(-283.46,188.98) AB8(-283.46,157.48) AB9(-283.46,125.98) AB10(-283.46,94.49) AB11(-283.46,62.99) AB12(-283.46,31.5) AB13(-283.46,0) AB14(-283.46,-31.5) AB15(-283.46,-62.99) AB16(-283.46,-94.49) AB17(-283.46,-125.98) AB18(-283.46,-157.48) AB19(-283.46,-188.98) AB20(-283.46,-220.47) AB21(-283.46,-251.97) AB22(-283.46,-283.46) AB23(-283.46,-314.96) AB24(-283.46,-346.46) AB25(-283.46,-377.95) AC1(-314.96,377.95) AC2(-314.96,346.46) AC3(-314.96,314.96) AC4(-314.96,283.46) AC5(-314.96,251.97) AC6(-314.96,220.47) AC7(-314.96,188.98) AC8(-314.96,157.48) AC9(-314.96,125.98) AC10(-314.96,94.49) AC11(-314.96,62.99) AC12(-314.96,31.5) AC13(-314.96,0) AC14(-314.96,-31.5) AC15(-314.96,-62.99) AC16(-314.96,-94.49) AC17(-314.96,-125.98) AC18(-314.96,-157.48) AC19(-314.96,-188.98) AC20(-314.96,-220.47) AC21(-314.96,-251.97) AC22(-314.96,-283.46) AC23(-314.96,-314.96) AC24(-314.96,-346.46) AC25(-314.96,-377.95) AD1(-346.46,377.95) AD2(-346.46,346.46) AD3(-346.46,314.96) AD4(-346.46,283.46) AD5(-346.46,251.97) AD6(-346.46,220.47) AD7(-346.46,188.98) AD8(-346.46,157.48) AD9(-346.46,125.98) AD10(-346.46,94.49) AD11(-346.46,62.99) AD12(-346.46,31.5) AD13(-346.46,0) AD14(-346.46,-31.5) AD15(-346.46,-62.99) AD16(-346.46,-94.49) AD17(-346.46,-125.98) AD18(-346.46,-157.48) AD19(-346.46,-188.98) AD20(-346.46,-220.47) AD21(-346.46,-251.97) AD22(-346.46,-283.46) AD23(-346.46,-314.96) AD24(-346.46,-346.46) AD25(-346.46,-377.95) AE1(-377.95,377.95) AE2(-377.95,346.46) AE3(-377.95,314.96) AE4(-377.95,283.46) AE5(-377.95,251.97) AE6(-377.95,220.47) AE7(-377.95,188.98) AE8(-377.95,157.48) AE9(-377.95,125.98) AE10(-377.95,94.49) AE11(-377.95,62.99) AE12(-377.95,31.5) AE13(-377.95,0) AE14(-377.95,-31.5) AE15(-377.95,-62.99) AE16(-377.95,-94.49) AE17(-377.95,-125.98) AE18(-377.95,-157.48) AE19(-377.95,-188.98) AE20(-377.95,-220.47) AE21(-377.95,-251.97) AE22(-377.95,-283.46) AE23(-377.95,-314.96) AE24(-377.95,-346.46) AE25(-377.95,-377.95) B1(346.46,377.95) B2(346.46,346.46) B3(346.46,314.96) B4(346.46,283.46) B5(346.46,251.97) B6(346.46,220.47) B7(346.46,188.98) B8(346.46,157.48) B9(346.46,125.98) B10(346.46,94.49) B11(346.46,62.99) B12(346.46,31.5) B13(346.46,0) B14(346.46,-31.5) B15(346.46,-62.99) B16(346.46,-94.49) B17(346.46,-125.98) B18(346.46,-157.48) B19(346.46,-188.98) B20(346.46,-220.47) B21(346.46,-251.97) B22(346.46,-283.46) B23(346.46,-314.96) B24(346.46,-346.46) B25(346.46,-377.95) C1(314.96,377.95) C2(314.96,346.46) C3(314.96,314.96) C4(314.96,283.46) C5(314.96,251.97) C6(314.96,220.47) C7(314.96,188.98) C8(314.96,157.48) C9(314.96,125.98) C10(314.96,94.49) C11(314.96,62.99) C12(314.96,31.5) C13(314.96,0) C14(314.96,-31.5) C15(314.96,-62.99) C16(314.96,-94.49) C17(314.96,-125.98) C18(314.96,-157.48) C19(314.96,-188.98) C20(314.96,-220.47) C21(314.96,-251.97) C22(314.96,-283.46) C23(314.96,-314.96) C24(314.96,-346.46) C25(314.96,-377.95) D1(283.46,377.95) D2(283.46,346.46) D3(283.46,314.96) D4(283.46,283.46) D5(283.46,251.97) D6(283.46,220.47) D7(283.46,188.98) D8(283.46,157.48) D9(283.46,125.98) D10(283.46,94.49) D11(283.46,62.99) D12(283.46,31.5) D13(283.46,0) D14(283.46,-31.5) D15(283.46,-62.99) D16(283.46,-94.49) D17(283.46,-125.98) D18(283.46,-157.48) D19(283.46,-188.98) D20(283.46,-220.47) D21(283.46,-251.97) D22(283.46,-283.46) D23(283.46,-314.96) D24(283.46,-346.46) D25(283.46,-377.95) E1(251.97,377.95) E2(251.97,346.46) E3(251.97,314.96) E4(251.97,283.46) E5(251.97,251.97) E6(251.97,220.47) E7(251.97,188.98) E8(251.97,157.48) E9(251.97,125.98) E10(251.97,94.49) E11(251.97,62.99) E12(251.97,31.5) E13(251.97,0) E14(251.97,-31.5) E15(251.97,-62.99) E16(251.97,-94.49) E17(251.97,-125.98) E18(251.97,-157.48) E19(251.97,-188.98) E20(251.97,-220.47) E21(251.97,-251.97) E22(251.97,-283.46) E23(251.97,-314.96) E24(251.97,-346.46) E25(251.97,-377.95) F1(220.47,377.95) F2(220.47,346.46) F3(220.47,314.96) F4(220.47,283.46) F5(220.47,251.97) F6(220.47,220.47) F7(220.47,188.98) F8(220.47,157.48) F9(220.47,125.98) F10(220.47,94.49) F11(220.47,62.99) F12(220.47,31.5) F13(220.47,0) F14(220.47,-31.5) F15(220.47,-62.99) F16(220.47,-94.49) F17(220.47,-125.98) F18(220.47,-157.48) F19(220.47,-188.98) F20(220.47,-220.47) F21(220.47,-251.97) F22(220.47,-283.46) F23(220.47,-314.96) F24(220.47,-346.46) F25(220.47,-377.95) G1(188.98,377.95) G2(188.98,346.46) G3(188.98,314.96) G4(188.98,283.46) G5(188.98,251.97) G6(188.98,220.47) G7(188.98,188.98) G8(188.98,157.48) G9(188.98,125.98) G10(188.98,94.49) G11(188.98,62.99) G12(188.98,31.5) G13(188.98,0) G14(188.98,-31.5) G15(188.98,-62.99) G16(188.98,-94.49) G17(188.98,-125.98) G18(188.98,-157.48) G19(188.98,-188.98) G20(188.98,-220.47) G21(188.98,-251.97) G22(188.98,-283.46) G23(188.98,-314.96) G24(188.98,-346.46) G25(188.98,-377.95) H1(157.48,377.95) H2(157.48,346.46) H3(157.48,314.96) H4(157.48,283.46) H5(157.48,251.97) H6(157.48,220.47) H7(157.48,188.98) H8(157.48,157.48) H9(157.48,125.98) H10(157.48,94.49) H11(157.48,62.99) H12(157.48,31.5) H13(157.48,0) H14(157.48,-31.5) H15(157.48,-62.99) H16(157.48,-94.49) H17(157.48,-125.98) H18(157.48,-157.48) H19(157.48,-188.98) H20(157.48,-220.47) H21(157.48,-251.97) H22(157.48,-283.46) H23(157.48,-314.96) H24(157.48,-346.46) H25(157.48,-377.95) J1(125.98,377.95) J2(125.98,346.46) J3(125.98,314.96) J4(125.98,283.46) J5(125.98,251.97) J6(125.98,220.47) J7(125.98,188.98) J8(125.98,157.48) J9(125.98,125.98) J10(125.98,94.49) J11(125.98,62.99) J12(125.98,31.5) J13(125.98,0) J14(125.98,-31.5) J15(125.98,-62.99) J16(125.98,-94.49) J17(125.98,-125.98) J18(125.98,-157.48) J19(125.98,-188.98) J20(125.98,-220.47) J21(125.98,-251.97) J22(125.98,-283.46) J23(125.98,-314.96) J24(125.98,-346.46) J25(125.98,-377.95) K1(94.49,377.95) K2(94.49,346.46) K3(94.49,314.96) K4(94.49,283.46) K5(94.49,251.97) K6(94.49,220.47) K7(94.49,188.98) K8(94.49,157.48) K9(94.49,125.98) K10(94.49,94.49) K11(94.49,62.99) K12(94.49,31.5) K13(94.49,0) K14(94.49,-31.5) K15(94.49,-62.99) K16(94.49,-94.49) K17(94.49,-125.98) K18(94.49,-157.48) K19(94.49,-188.98) K20(94.49,-220.47) K21(94.49,-251.97) K22(94.49,-283.46) K23(94.49,-314.96) K24(94.49,-346.46) K25(94.49,-377.95) L1(62.99,377.95) L2(62.99,346.46) L3(62.99,314.96) L4(62.99,283.46) L5(62.99,251.97) L6(62.99,220.47) L7(62.99,188.98) L8(62.99,157.48) L9(62.99,125.98) L10(62.99,94.49) L11(62.99,62.99) L12(62.99,31.5) L13(62.99,0) L14(62.99,-31.5) L15(62.99,-62.99) L16(62.99,-94.49) L17(62.99,-125.98) L18(62.99,-157.48) L19(62.99,-188.98) L20(62.99,-220.47) L21(62.99,-251.97) L22(62.99,-283.46) L23(62.99,-314.96) L24(62.99,-346.46) L25(62.99,-377.95) M1(31.5,377.95) M2(31.5,346.46) M3(31.5,314.96) M4(31.5,283.46) M5(31.5,251.97) M6(31.5,220.47) M7(31.5,188.98) M8(31.5,157.48) M9(31.5,125.98) M10(31.5,94.49) M11(31.5,62.99) M12(31.5,31.5) M13(31.5,0) M14(31.5,-31.5) M15(31.5,-62.99) M16(31.5,-94.49) M17(31.5,-125.98) M18(31.5,-157.48) M19(31.5,-188.98) M20(31.5,-220.47) M21(31.5,-251.97) M22(31.5,-283.46) M23(31.5,-314.96) M24(31.5,-346.46) M25(31.5,-377.95) N1(0,377.95) N2(0,346.46) N3(0,314.96) N4(0,283.46) N5(0,251.97) N6(0,220.47) N7(0,188.98) N8(0,157.48) N9(0,125.98) N10(0,94.49) N11(0,62.99) N12(0,31.5) N13(0,0) N14(0,-31.5) N15(0,-62.99) N16(0,-94.49) N17(0,-125.98) N18(0,-157.48) N19(0,-188.98) N20(0,-220.47) N21(0,-251.97) N22(0,-283.46) N23(0,-314.96) N24(0,-346.46) N25(0,-377.95) P1(-31.5,377.95) P2(-31.5,346.46) P3(-31.5,314.96) P4(-31.5,283.46) P5(-31.5,251.97) P6(-31.5,220.47) P7(-31.5,188.98) P8(-31.5,157.48) P9(-31.5,125.98) P10(-31.5,94.49) P11(-31.5,62.99) P12(-31.5,31.5) P13(-31.5,0) P14(-31.5,-31.5) P15(-31.5,-62.99) P16(-31.5,-94.49) P17(-31.5,-125.98) P18(-31.5,-157.48) P19(-31.5,-188.98) P20(-31.5,-220.47) P21(-31.5,-251.97) P22(-31.5,-283.46) P23(-31.5,-314.96) P24(-31.5,-346.46) P25(-31.5,-377.95) R1(-62.99,377.95) R2(-62.99,346.46) R3(-62.99,314.96) R4(-62.99,283.46) R5(-62.99,251.97) R6(-62.99,220.47) R7(-62.99,188.98) R8(-62.99,157.48) R9(-62.99,125.98) R10(-62.99,94.49) R11(-62.99,62.99) R12(-62.99,31.5) R13(-62.99,0) R14(-62.99,-31.5) R15(-62.99,-62.99) R16(-62.99,-94.49) R17(-62.99,-125.98) R18(-62.99,-157.48) R19(-62.99,-188.98) R20(-62.99,-220.47) R21(-62.99,-251.97) R22(-62.99,-283.46) R23(-62.99,-314.96) R24(-62.99,-346.46) R25(-62.99,-377.95) T1(-94.49,377.95) T2(-94.49,346.46) T3(-94.49,314.96) T4(-94.49,283.46) T5(-94.49,251.97) T6(-94.49,220.47) T7(-94.49,188.98) T8(-94.49,157.48) T9(-94.49,125.98) T10(-94.49,94.49) T11(-94.49,62.99) T12(-94.49,31.5) T13(-94.49,0) T14(-94.49,-31.5) T15(-94.49,-62.99) T16(-94.49,-94.49) T17(-94.49,-125.98) T18(-94.49,-157.48) T19(-94.49,-188.98) T20(-94.49,-220.47) T21(-94.49,-251.97) T22(-94.49,-283.46) T23(-94.49,-314.96) T24(-94.49,-346.46) T25(-94.49,-377.95) U1(-125.98,377.95) U2(-125.98,346.46) U3(-125.98,314.96) U4(-125.98,283.46) U5(-125.98,251.97) U6(-125.98,220.47) U7(-125.98,188.98) U8(-125.98,157.48) U9(-125.98,125.98) U10(-125.98,94.49) U11(-125.98,62.99) U12(-125.98,31.5) U13(-125.98,0) U14(-125.98,-31.5) U15(-125.98,-62.99) U16(-125.98,-94.49) U17(-125.98,-125.98) U18(-125.98,-157.48) U19(-125.98,-188.98) U20(-125.98,-220.47) U21(-125.98,-251.97) U22(-125.98,-283.46) U23(-125.98,-314.96) U24(-125.98,-346.46) U25(-125.98,-377.95) V1(-157.48,377.95) V2(-157.48,346.46) V3(-157.48,314.96) V4(-157.48,283.46) V5(-157.48,251.97) V6(-157.48,220.47) V7(-157.48,188.98) V8(-157.48,157.48) V9(-157.48,125.98) V10(-157.48,94.49) V11(-157.48,62.99) V12(-157.48,31.5) V13(-157.48,0) V14(-157.48,-31.5) V15(-157.48,-62.99) V16(-157.48,-94.49) V17(-157.48,-125.98) V18(-157.48,-157.48) V19(-157.48,-188.98) V20(-157.48,-220.47) V21(-157.48,-251.97) V22(-157.48,-283.46) V23(-157.48,-314.96) V24(-157.48,-346.46) V25(-157.48,-377.95) W1(-188.98,377.95) W2(-188.98,346.46) W3(-188.98,314.96) W4(-188.98,283.46) W5(-188.98,251.97) W6(-188.98,220.47) W7(-188.98,188.98) W8(-188.98,157.48) W9(-188.98,125.98) W10(-188.98,94.49) W11(-188.98,62.99) W12(-188.98,31.5) W13(-188.98,0) W14(-188.98,-31.5) W15(-188.98,-62.99) W16(-188.98,-94.49) W17(-188.98,-125.98) W18(-188.98,-157.48) W19(-188.98,-188.98) W20(-188.98,-220.47) W21(-188.98,-251.97) W22(-188.98,-283.46) W23(-188.98,-314.96) W24(-188.98,-346.46) W25(-188.98,-377.95) Y1(-220.47,377.95) Y2(-220.47,346.46) Y3(-220.47,314.96) Y4(-220.47,283.46) Y5(-220.47,251.97) Y6(-220.47,220.47) Y7(-220.47,188.98) Y8(-220.47,157.48) Y9(-220.47,125.98) Y10(-220.47,94.49) Y11(-220.47,62.99) Y12(-220.47,31.5) Y13(-220.47,0) Y14(-220.47,-31.5) Y15(-220.47,-62.99) Y16(-220.47,-94.49) Y17(-220.47,-125.98) Y18(-220.47,-157.48) Y19(-220.47,-188.98) Y20(-220.47,-220.47) Y21(-220.47,-251.97) Y22(-220.47,-283.46) Y23(-220.47,-314.96) Y24(-220.47,-346.46) Y25(-220.47,-377.95)
  silkscreen extent -420,-420 463,420
IND-1uH-2.65A [mm]
  rect 5.3x2 smd: 1(0,-1.75) 2(0,1.75)
  silkscreen extent -2.9,-3 2.9,3
LED0603 [mm]
  rect 1x0.9 smd: 1(0,0) 2(0,-1.6)
  silkscreen extent -0.7,-2.5 0.7,0.6
QFN-56 [mil]
  rrect0% 29x11 smd: 1(0,0) 2(0,19.68) 3(0,39.37) 4(0,59.05) 5(0,78.74) 6(0,98.42) 7(0,118.11) 8(0,137.79) 9(0,157.48) 10(0,177.16) 11(0,196.85) 12(0,216.53) 13(0,236.22) 14(0,255.9) 29(-303.3,255.9) 30(-303.3,236.22) 31(-303.3,216.53) 32(-303.3,196.85) 33(-303.3,177.16) 34(-303.3,157.48) 35(-303.3,137.79) 36(-303.3,118.11) 37(-303.3,98.42) 38(-303.3,78.74) 39(-303.3,59.05) 40(-303.3,39.37) 41(-303.3,19.68) 42(-303.3,0)
  rrect0% 11x29 smd: 15(-23.7,279.6) 16(-43.38,279.6) 17(-63.07,279.6) 18(-82.75,279.6) 19(-102.44,279.6) 20(-122.12,279.6) 21(-141.81,279.6) 22(-161.49,279.6) 23(-181.18,279.6) 24(-200.86,279.6) 25(-220.55,279.6) 26(-240.23,279.6) 27(-259.92,279.6) 28(-279.6,279.6) 43(-279.6,-23.7) 44(-259.92,-23.7) 45(-240.23,-23.7) 46(-220.55,-23.7) 47(-200.86,-23.7) 48(-181.18,-23.7) 49(-161.49,-23.7) 50(-141.81,-23.7) 51(-122.12,-23.7) 52(-102.44,-23.7) 53(-82.75,-23.7) 54(-63.07,-23.7) 55(-43.38,-23.7) 56(-23.7,-23.7)
  rect 177x177 smd: 57(-151.65,127.95)
  silkscreen extent -316,-45 33,292
SC70 [mil]
  rect 16x32 smd: 1(0,0) 2(25.6,0) 3(51.2,0) 4(51.2,85) 5(0,85)
  silkscreen extent -25,9 76,76
SOD323 [mm]
  rect 1x1 smd: 1(-1.35,0) 2(1.35,0)
  silkscreen extent -2.1,-0.7 2.1,0.7
SOT143-4 [mil]
  rect 40x60 smd: 1(0,0)
  rect 25x60 smd: 2(67,0) 3(67,76) 4(-8,76)
  silkscreen extent -38,-60 96,72
XTAL2-3P2X1P5-SM [mil]
  rect 43x75 smd: 1(0,0) 2(98.42,0)
  silkscreen extent -32,-48 131,48
XTAL4_SX_3225 [mil]
  rect 51x43 smd: 1(0,0) 2(90.56,0) 3(90.56,74.8) 4(0,74.8)
  silkscreen extent -37,-66 128,109